# Allegro board DRV830x_D1-RELEASE.brd
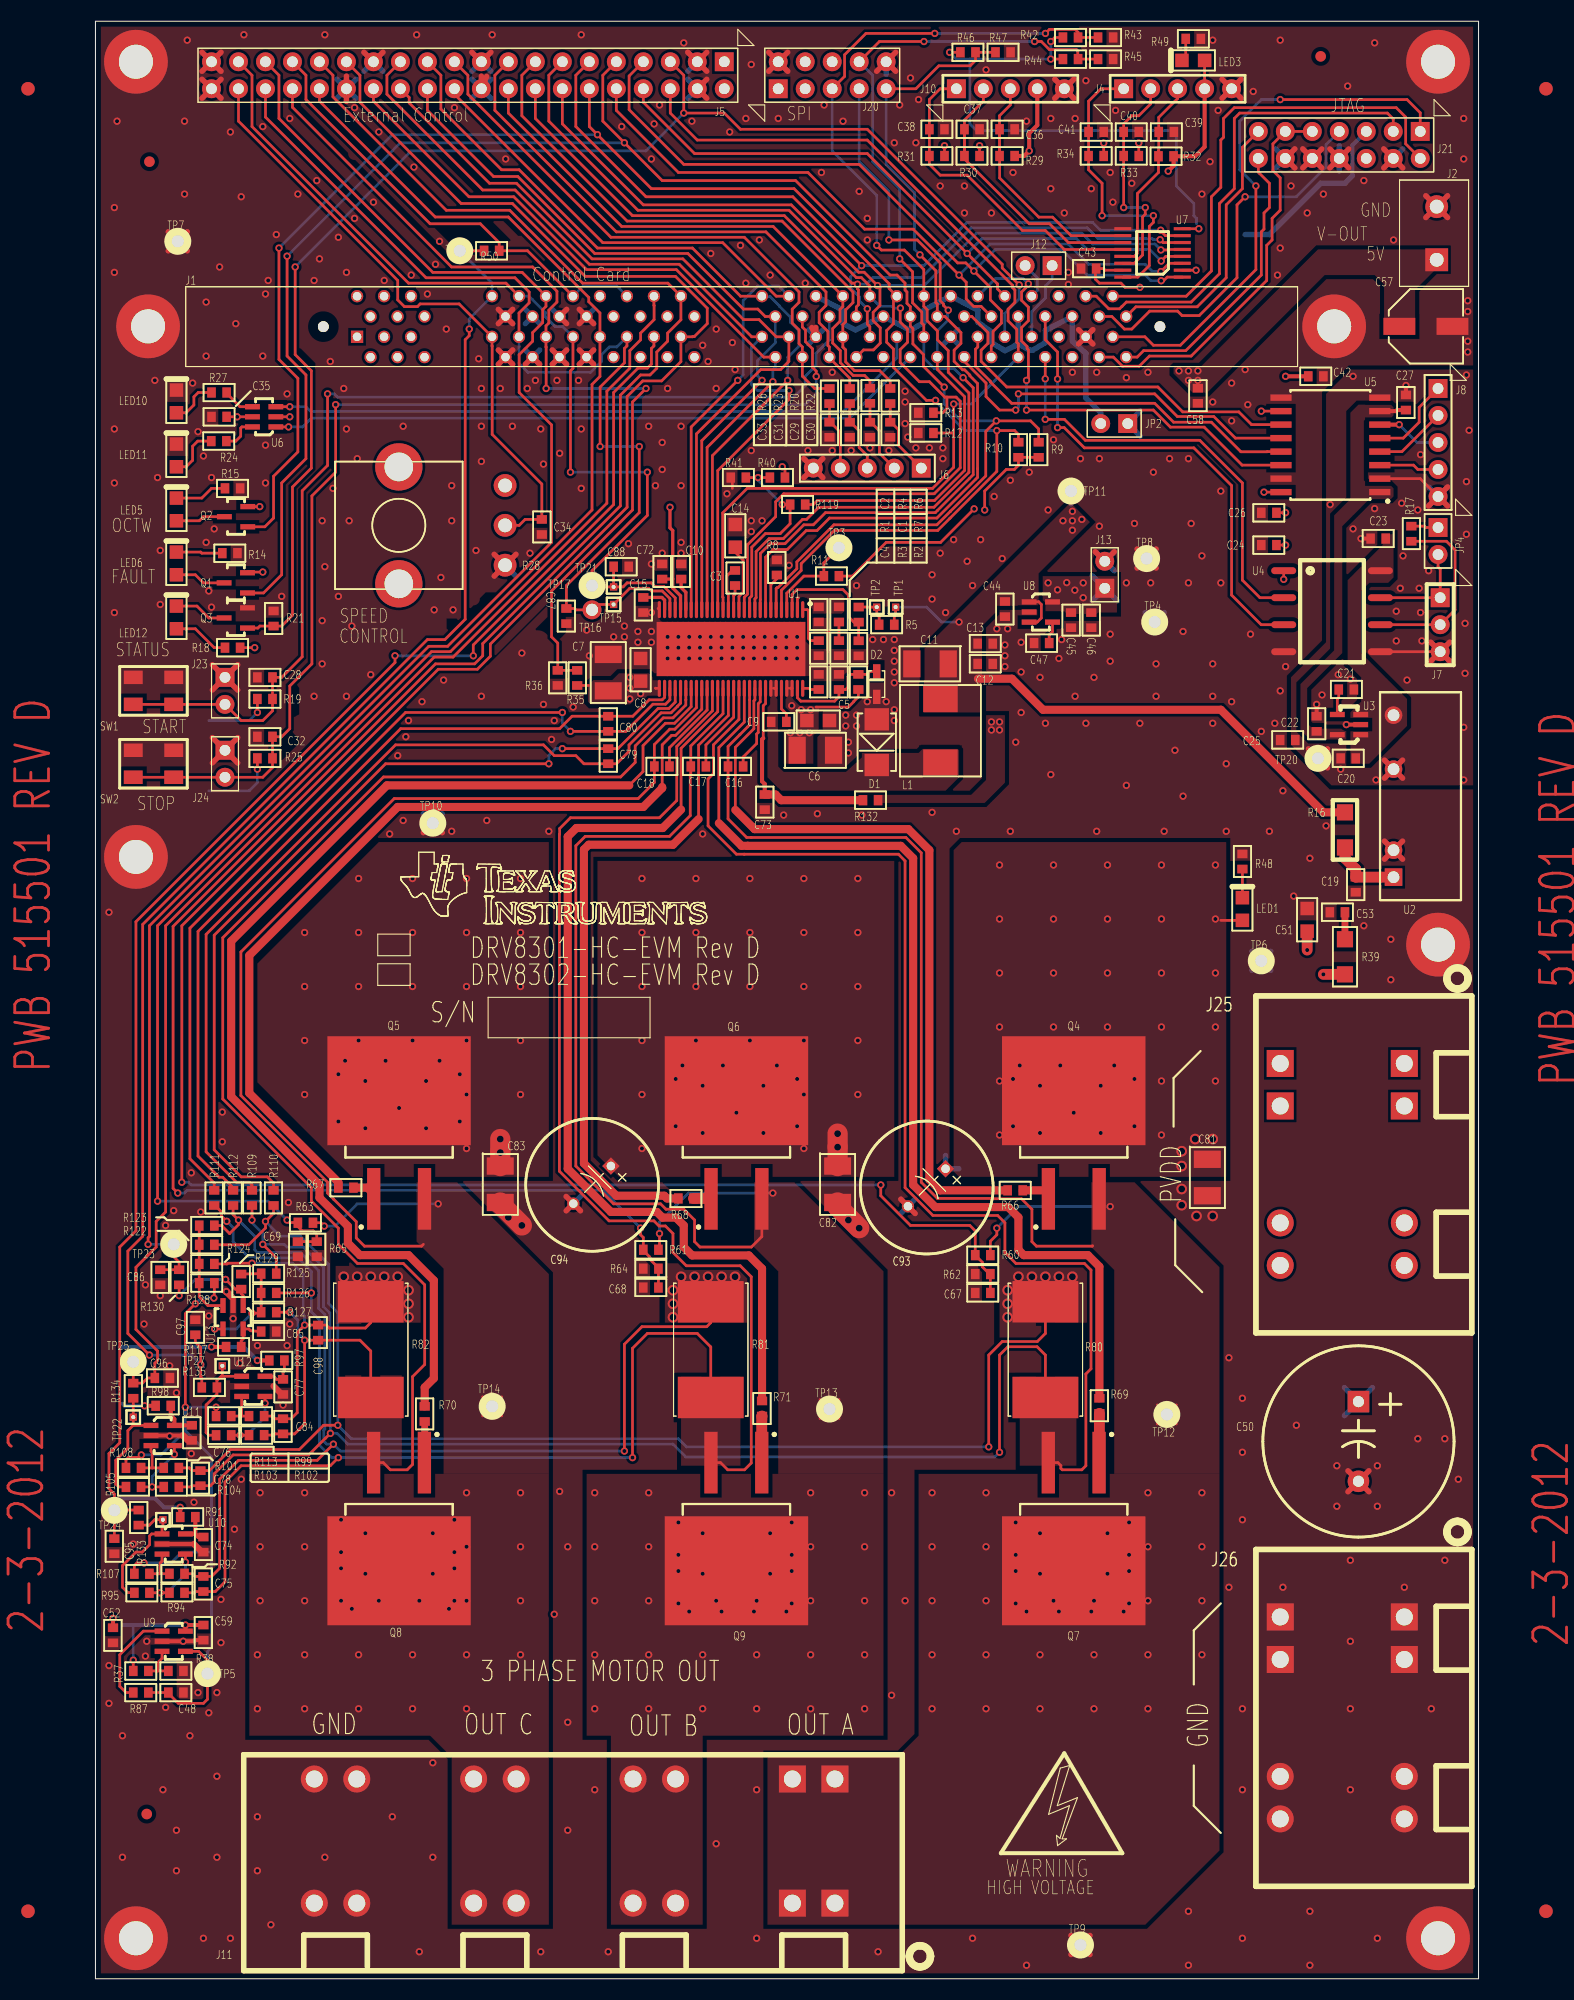
[diagram p0: board, top side]
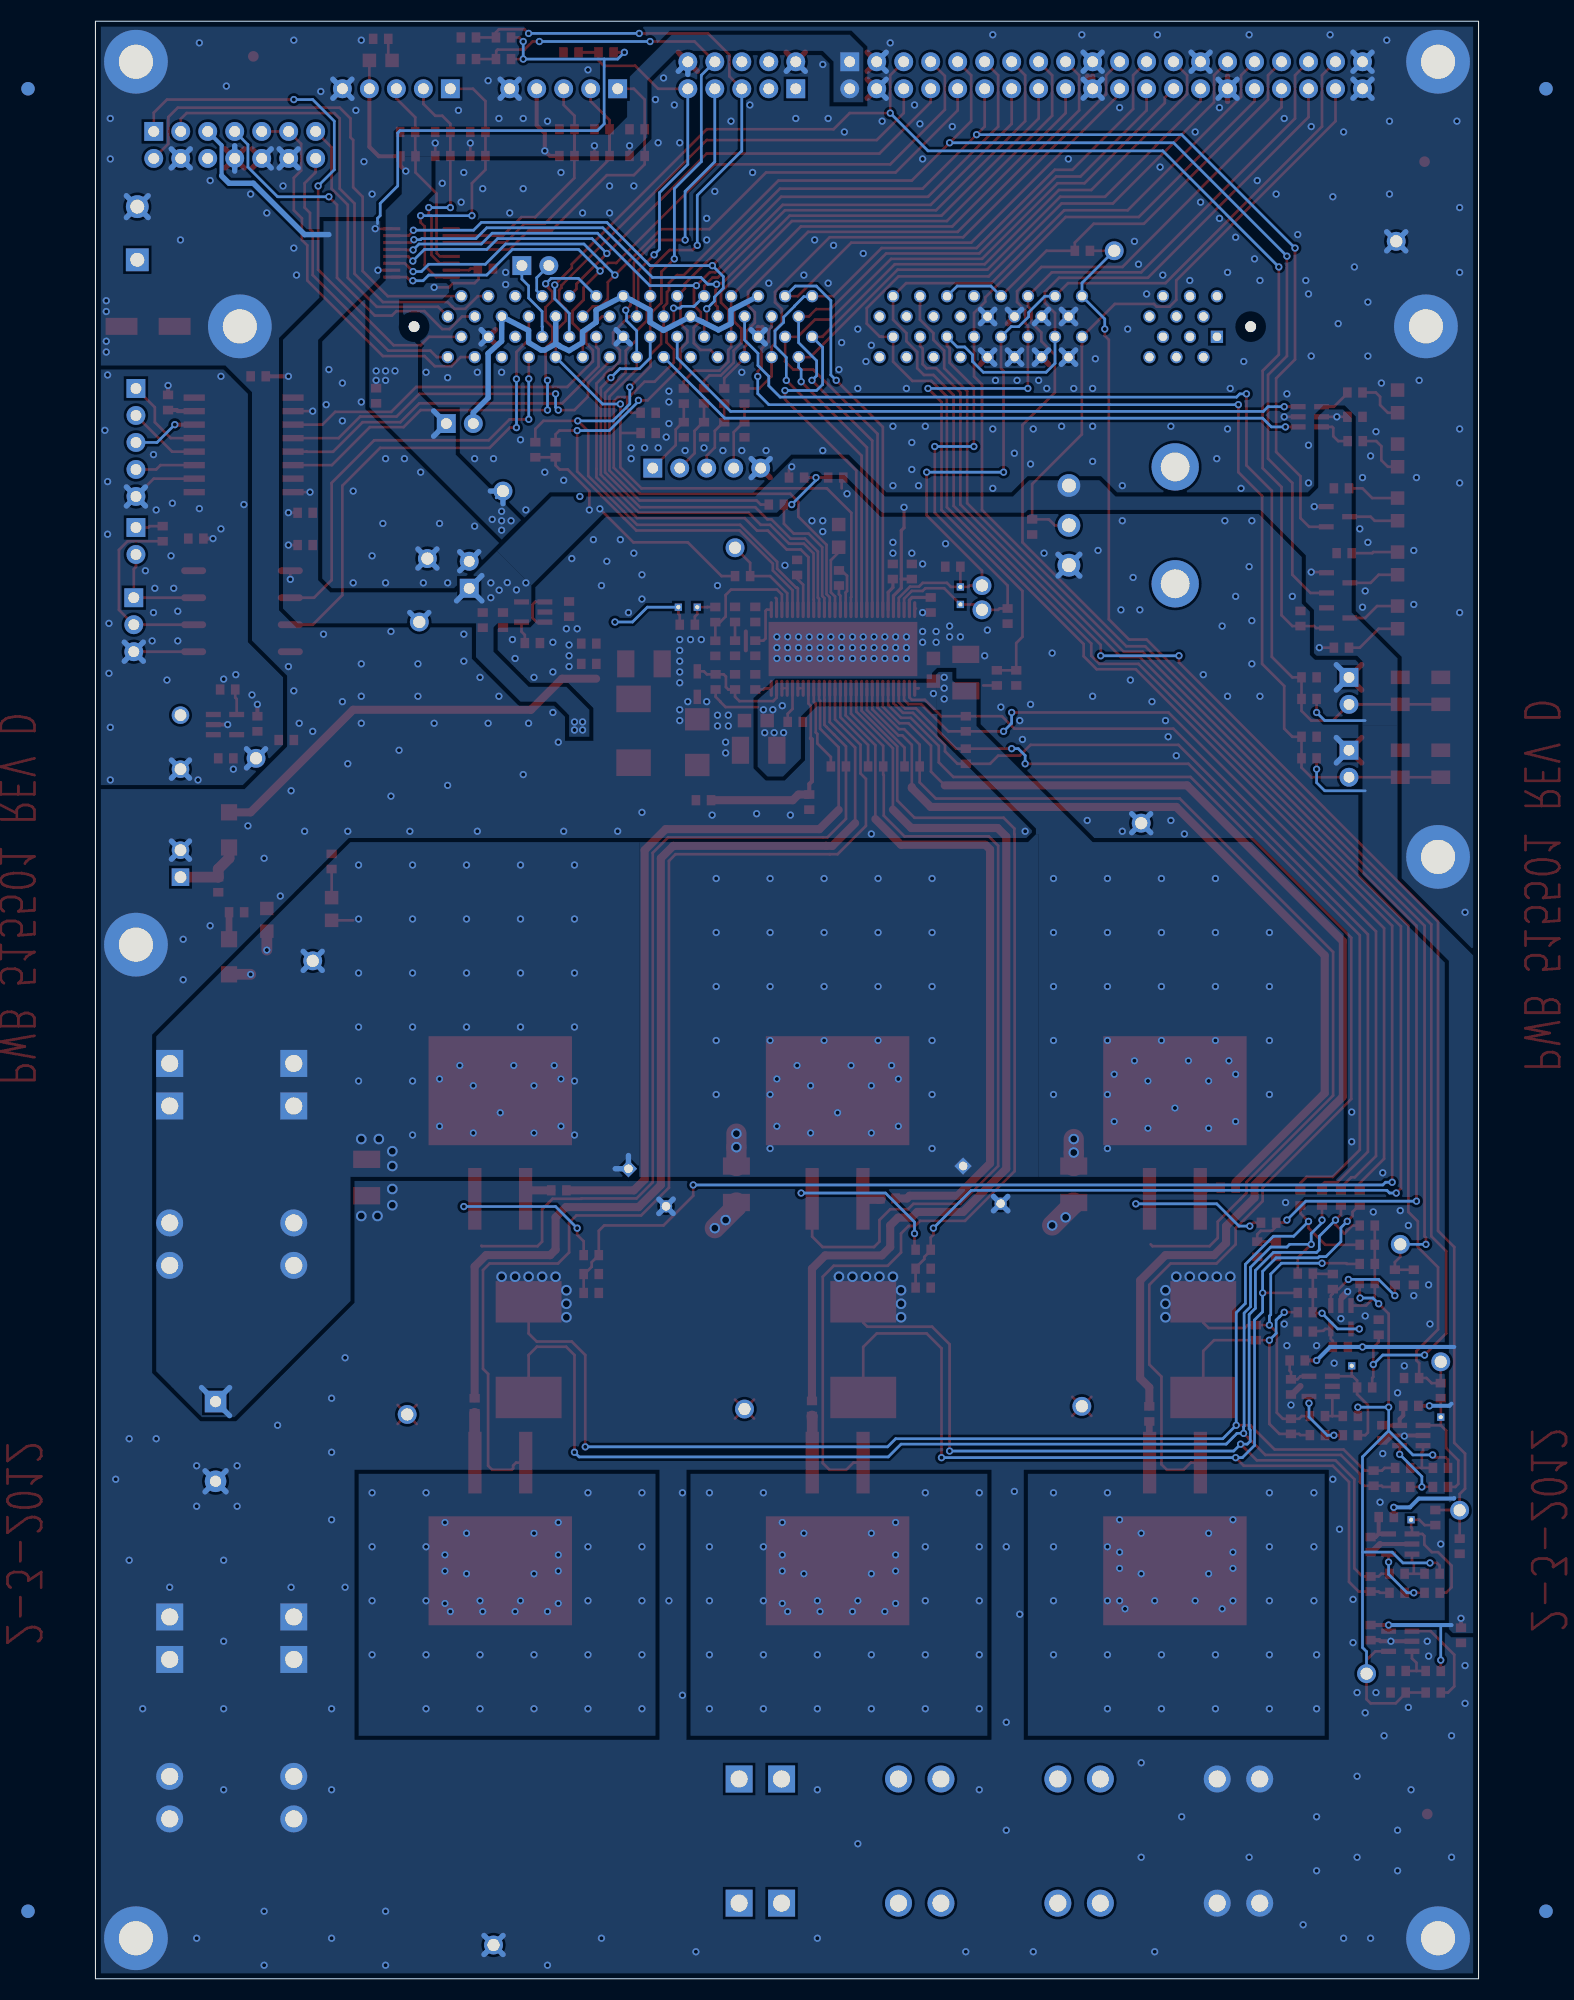
[diagram p1: board, bottom side, seen from below]

Outline 130.18 x 184.15 mm; copper layers: TOP, BOTTOM. Coordinates in mm from the lower left corner of the outline.
Outline path: rectangle 0,0 130.18,184.15

## Placement (name value [footprint] x y rotation side)
C1  6800pF  [D3-SM_C_0603_NP]  69.98 124.46 90 top
C2  39pF  [D3-SM_C_0603_NP]  68.07 127.64 90 top
C3  0.022uF  [D3-SM_C_0603_NP]  60.2 131.06 90 top
C4  0.015uF  [D3-SM_C_0603_NP]  68.07 121.28 90 top
C5  0.1uF  [D3-SM_C_0805_NP]  69.09 118.36 180 top
C6  2.2uF  [D3-SM_C_1210_NP]  66.04 115.57 0 top
C7  2.2uF  [D3-SM_C_1210_NP]  48.26 121.16 90 top
C8  0.1uF  [D3-SM_C_0805_NP]  51.31 124.21 270 top
C9  0.1uF  [D3-SM_C_0603_NP]  65.02 118.24 180 top
C10  1uF  [D3-SM_C_0603_NP]  55.13 133.1 270 top
C11  47uF  [D3-SM_C_1210_NP]  80.26 123.7 180 top
C12  1uF  [D3-SM_C_0603_NP]  84.45 123.7 180 top
C13  0.1uF  [D3-SM_C_0603_NP]  84.45 125.6 180 top
C14  2.2uF  [D3-SM_C_0805_NP]  60.22 134.67 90 top
C15  1uF  [D3-SM_C_0603_NP]  51.56 128.52 90 top
C16  0.1uF  [D3-SM_C_0603_NP]  60.96 114.05 180 top
C17  0.1uF  [D3-SM_C_0603_NP]  57.45 114.05 180 top
C18  0.1uF  [D3-SM_C_0603_NP]  54.03 114.05 180 top
C19  1uF  [D3-SM_C_0603_NP]  118.62 103.63 270 top
C20  2.2uF  [D3-SM_C_0603_NP]  118.62 114.81 180 top
C21  0.1uF  [D3-SM_C_0603_NP]  118.44 121.28 180 top
C22  2.2uF  [D3-SM_C_0603_NP]  114.94 117.35 90 top
C23  1uF  [D3-SM_C_0603_NP]  121.44 135.48 180 top
C24  0.1uF  [D3-SM_C_0603_NP]  109.73 134.87 0 top
C25  0.1uF  [D3-SM_C_0603_NP]  112.93 116.54 180 top
C26  0.1uF  [D3-SM_C_0603_NP]  109.73 137.91 0 top
C27  0.1uF  [D3-SM_C_0603_NP]  123.34 149 270 top
C28  0.1uF  [D3-SM_C_0603_NP]  15.24 122.43 0 top
C29  0.47 uF  [D3-SM_C_0603_NP]  72.9 146.43 270 top
C30  0.47 uF  [D3-SM_C_0603_NP]  74.8 146.43 270 top
C31  0.47 uF  [D3-SM_C_0603_NP]  70.99 146.43 270 top
C32  0.1uF  [D3-SM_C_0603_NP]  15.24 116.84 0 top
C33  0.47 uF  [D3-SM_C_0603_NP]  69.09 146.43 270 top
C34  0.1uF  [D3-SM_C_0603_NP]  42.01 135.86 90 top
C35  0.1uF  [D3-SM_C_0603_NP]  10.92 146.94 0 top
C36  0.001uF  [D3-SM_C_0603_NP]  85.09 173.99 0 top
C37  0.001uF  [D3-SM_C_0603_NP]  81.79 173.99 0 top
C38  0.001uF  [D3-SM_C_0603_NP]  78.49 173.99 0 top
C39  0.001uF  [D3-SM_C_0603_NP]  100.08 173.74 0 top
C40  0.001uF  [D3-SM_C_0603_NP]  96.77 173.74 0 top
C41  0.001uF  [D3-SM_C_0603_NP]  93.47 173.74 0 top
C42  0.1uF  [D3-SM_C_0603_NP]  115.57 150.75 180 top
C43  0.1uF  [D3-SM_C_0603_NP]  92.76 160.88 0 top
C44  2.2uF  [D3-SM_C_0603_NP]  85.6 129.57 270 top
C45  0.1uF  [D3-SM_C_0603_NP]  91.82 127.1 90 top
C46  2.2uF  [D3-SM_C_0603_NP]  93.73 128.52 270 top
C47  0.1uF  [D3-SM_C_0603_NP]  88.34 125.65 0 top
C48  2.2uF  [D3-SM_C_0603_NP]  6.86 26.92 0 top
C50  1000uF  [D3-PAN-TS-18X35MM]  118.87 50.55 0 top
C51  0.1uF  [D3-SM_C_0805_NP]  114.05 98.55 90 top
C52  NP  [D3-SM_C_0603_NP]  1.65 33.02 270 top
C53  0.01uF  [D3-SM_C_0603_NP]  117.6 100.33 180 top
C57  220uF  [D3-PAN-FK-CASE-D]  125.22 155.45 90 top
C58  0.1uF  [D3-SM_C_0603_NP]  103.76 148.21 90 top
C59  0.1uF  [D3-SM_C_0603_NP]  10.16 33.27 270 top
C67  0.1uF  [D3-SM_C_0603_NP]  84.23 64.52 180 top
C68  0.1uF  [D3-SM_C_0603_NP]  52.98 65.02 180 top
C69  0.1uF  [D3-SM_C_0603_NP]  19.05 69.34 270 top
C72  0.1uF  [D3-SM_C_0603_NP]  53.34 133.1 270 top
C73  0.1uF  [D3-SM_C_0603_NP]  62.99 109.98 90 top
C74  0.1uF  [D3-SM_C_0603_NP]  10.16 40.13 90 top
C75  1000pF  [D3-SM_C_0603_NP]  10.16 37.85 270 top
C76  0.1uF  [D3-SM_C_0603_NP]  9.07 50.65 90 top
C77  0.1uF  [D3-SM_C_0603_NP]  17.65 54.97 90 top
C78  1000pF  [D3-SM_C_0603_NP]  9.88 47.8 270 top
C79  0.001uF  [D3-SM_C_0603_NP]  48.26 114.3 90 top
C80  0.001uF  [D3-SM_C_0603_NP]  48.26 117.35 90 top
C81  2.2uF  [D3-SM_C_1210_NP]  104.65 77.09 270 top
C82  2.2uF  [D3-SM_C_1210_NP]  69.85 76.45 270 top
C83  2.2uF  [D3-SM_C_1210_NP]  38.1 76.45 270 top
C84  1000pF  [D3-SM_C_0603_NP]  17.65 52.68 270 top
C85  0.1uF  [D3-SM_C_0603_NP]  17.02 60.88 180 top
C86  NP  [D3-SM_C_0603_NP]  6.1 66.7 270 top
C87  NP  [D3-SM_C_0603_NP]  44.32 128.91 270 top
C88  NP  [D3-SM_C_0603_NP]  48.77 132.84 0 top
C93  330uF  [D3-PAN-VZ-12_5X25MM]  80.01 76.2 315 top
C94  330uF  [D3-PAN-VZ-12_5X25MM]  48.51 76.45 315 top
C95  NP  [D3-SM_C_0603_NP]  1.78 41.4 270 top
C96  NP  [D3-SM_C_0603_NP]  5.59 56.52 0 top
C97  NP  [D3-SM_C_0603_NP]  9.4 60.58 90 top
C98  0.001uF  [D3-SM_C_0603_NP]  20.95 60.07 90 top
D1  CDBB2100-G  [D3-SMB-12]  73.53 116.33 180 top
D2  NP  [D3-SOD323-21]  73.53 121.79 90 top
J1  DIMM100  [D3-CONTROLCARD100-SOCKET]  24.62 154.47 0 top
J2  TERM BLOCK 2x1  [D3-TB-5MM-2X1_1]  126.24 164.21 90 top
J4  HEADER5x1  [D3-ST_HEADER_5_100]  96.77 177.8 0 top
J5  HEADER20x2  [D3-ST_HEADER_20X2_100]  59.18 180.34 180 top
J6  HEADER5x1  [D3-ST_HEADER_5_100]  77.72 142.11 180 top
J7  HEADER3x1  [D3-ST_HEADER_3_100]  126.57 129.92 270 top
J8  HEADER5x1  [D3-ST_HEADER_5_100]  126.36 149.61 270 top
J10  HEADER5x1  [D3-ST_HEADER_5_100]  81.03 177.8 0 top
J11  TERM BLOCK HEADER 4x1  [D3-TB-5MM-4X1_4HOLES_CKT]  69.6 7.11 180 top
J12  HEADER2x1  [D3-ST_HEADER_2_100]  90.04 161.16 180 top
J13  HEADER2x1  [D3-ST_HEADER_2_100]  95 130.81 90 top
J20  HEADER5x2  [D3-ST_HEADER_5X2_100]  64.26 177.8 0 top
J21  HEADER7x2  [D3-ST_HEADER_7X2_100]  124.69 173.79 180 top
J23  HEADER2x1  [D3-ST_HEADER_2_100]  12.19 122.43 270 top
J24  HEADER2x1  [D3-ST_HEADER_2_100]  12.19 115.57 270 top
J25  TERM BLOCK HEADER 2x1  [D3-TB-15MM-2X1_4HOLES_CKT]  123.19 86.11 270 top
J26  TERM BLOCK HEADER 2x1  [D3-TB-15MM-2X1_4HOLES_CKT]  123.19 34.04 270 top
JP2  JUMPER  [D3-ST_HEADER_2_100]  97.16 146.3 180 top
JP4  JUMPER  [D3-ST_HEADER_2_100]  126.36 136.53 270 top
L1  33uH  [D3-COILTRONICS-DR73]  79.53 114.4 90 top
LED1  GREEN  [D3-SM_D_0805_ALT]  107.95 99.57 90 top
LED3  GREEN  [D3-SM_D_0805_ALT]  104.39 180.47 180 top
LED5  YELLOW  [D3-SM_D_0805_ALT]  7.62 137.16 90 top
LED6  RED  [D3-SM_D_0805_ALT]  7.62 132.08 90 top
LED10  GREEN  [D3-SM_D_0805_ALT]  7.62 147.32 90 top
LED11  GREEN  [D3-SM_D_0805_ALT]  7.62 142.24 90 top
LED12  GREEN  [D3-SM_D_0805_ALT]  7.62 127 90 top
MH1  MOUNT HOLE  [D3-MH_4-40]  3.81 180.34 0 top
MH2  MOUNT HOLE  [D3-MH_4-40]  126.36 180.34 0 top
MH3  MOUNT HOLE  [D3-MH_4-40]  4.95 155.45 0 top
MH4  MOUNT HOLE  [D3-MH_4-40]  116.59 155.45 0 top
MH5  MOUNT HOLE  [D3-MH_4-40]  3.81 3.81 0 top
MH6  MOUNT HOLE  [D3-MH_4-40]  126.36 3.81 0 top
MH7  MOUNT HOLE  [D3-MH_4-40]  3.81 105.54 0 top
MH8  MOUNT HOLE  [D3-MH_4-40]  126.36 97.28 0 top
NOREF  -  [unnamed]  -6.35 6.35 0 top
NOREF#2  -  [#2]  0 184.15 0 top
NOREF#3  -  [#2]  37.67 101.42 0 top
NOREF#4  -  [#2]  142.88 0 90 top
NOREF#5  -  [unnamed]  136.53 177.8 0 top
NOREF#6  -  [#2]  132.08 184.78 0 top
NOREF#7  -  [unnamed#3]  115.32 180.85 0 top
NOREF#8  -  [unnamed#3]  5.08 170.94 0 top
NOREF#9  -  [#2]  128.32 171.42 0 top
NOREF#10  -  [unnamed#3]  4.83 15.49 0 top
NOREF#11  -  [#2]  -36.2 -33.45 0 top
NOREF#12  -  [unnamed]  136.53 6.35 0 top
NOREF#13  -  [unnamed]  -6.35 177.8 0 top
NOREF#14  -  [#2]  -36.2 -33.45 0 top
NOREF#15  -  [#2]  -12.7 184.15 0 top
NOREF#16  -  [unnamed]  136.53 6.35 180 bottom
NOREF#17  -  [unnamed]  136.53 177.8 180 bottom
NOREF#18  -  [unnamed]  -6.35 6.35 180 bottom
NOREF#19  -  [unnamed]  -6.35 177.8 180 bottom
Q1  Si2325  [D3-TI-SOT23-DBV3]  13.21 131.32 180 top
Q2  Si2325  [D3-TI-SOT23-DBV3]  13.23 137.54 180 top
Q3  2N7002E  [D3-TI-SOT23-DBV3]  13.21 128.02 180 top
Q4  SUM110N06-3m9H  [D3-TO254_TO229_COMBINED]  92.08 78.74 90 top
Q5  SUM110N06-3m9H  [D3-TO254_TO229_COMBINED]  28.57 78.74 90 top
Q6  SUM110N06-3m9H  [D3-TO254_TO229_COMBINED]  60.33 78.74 90 top
Q7  SUM110N06-3m9H  [D3-TO254_TO229_COMBINED]  92.08 43.18 270 top
Q8  SUM110N06-3m9H  [D3-TO254_TO229_COMBINED]  28.57 43.18 270 top
Q9  SUM110N06-3m9H  [D3-TO254_TO229_COMBINED]  60.33 43.18 270 top
R1  205K_1%  [D3-SM_R_0603]  68.07 124.46 90 top
R2  NP  [D3-SM_R_0603]  71.81 121.28 90 top
R3  NP  [D3-SM_R_0603]  69.98 121.28 90 top
R4  28.0K_1%  [D3-SM_R_0603]  69.98 127.64 90 top
R5  0.0  [D3-SM_R_0603]  75.18 127.38 180 top
R6  53.6K_1%  [D3-SM_R_0603]  71.83 129.04 270 top
R7  10K_1%  [D3-SM_R_0603]  71.83 125.87 270 top
R8  1  [D3-SM_R_0603]  64.14 133.48 270 top
R9  10K_1%  [D3-SM_R_0603]  88.77 143.13 90 top
R10  10K_1%  [D3-SM_R_0603]  86.87 143.13 90 top
R11  10K_1%  [D3-SM_R_0603]  69.98 131.95 180 top
R12  1K  [D3-SM_R_0603]  78.87 145.41 180 top
R13  1K  [D3-SM_R_0603]  78.87 147.32 180 top
R14  330  [D3-SM_R_0603]  11.94 134.11 0 top
R15  330  [D3-SM_R_0603]  12.19 140.21 0 top
R16  1  [D3-SM_R_1206]  117.6 109.73 270 top
R17  120  [D3-SM_R_0603]  123.85 135.23 90 top
R18  330  [D3-SM_R_0603]  12.19 125.22 0 top
R19  4.99K_1%  [D3-SM_R_0603]  15.24 120.4 0 top
R20  470  [D3-SM_R_0603]  72.9 148.21 90 top
R21  1K  [D3-SM_R_0603]  16.76 127.25 90 top
R22  470  [D3-SM_R_0603]  74.8 149.61 270 top
R23  470  [D3-SM_R_0603]  70.99 149.61 270 top
R24  330  [D3-SM_R_0603]  12.32 144.65 180 top
R25  4.99K_1%  [D3-SM_R_0603]  15.24 114.81 0 top
R26  470  [D3-SM_R_0603]  69.09 149.61 270 top
R27  330  [D3-SM_R_0603]  10.92 149.22 0 top
R28  10K 1-turn  [D3-CTS-296]  33.55 136.73 180 top
R29  1K  [D3-SM_R_0603]  86.51 171.48 180 top
R30  1K  [D3-SM_R_0603]  83.21 171.48 180 top
R31  1K  [D3-SM_R_0603]  79.91 171.48 180 top
R32  1K  [D3-SM_R_0603]  101.47 171.45 180 top
R33  1K  [D3-SM_R_0603]  98.2 171.48 180 top
R34  1K  [D3-SM_R_0603]  94.89 171.48 180 top
R35  95.3K_1%  [D3-SM_R_0603]  45.34 121.67 90 top
R36  4.99K_1%  [D3-SM_R_0603]  43.51 123.09 270 top
R37  10K .1%  [D3-SM_R_0603]  3.56 28.96 0 top
R38  10K .1%  [D3-SM_R_0603]  6.86 28.96 0 top
R39  3.3  [D3-SM_R_1206]  117.6 94.49 90 top
R40  NP  [D3-SM_R_0603]  64.9 141.22 180 top
R41  NP  [D3-SM_R_0603]  61.21 141.22 180 top
R42  NP  [D3-SM_R_0603]  91.06 182.63 0 top
R43  NP  [D3-SM_R_0603]  94.36 182.63 0 top
R44  NP  [D3-SM_R_0603]  91.06 180.59 0 top
R45  NP  [D3-SM_R_0603]  94.36 180.59 0 top
R46  NP  [D3-SM_R_0603]  81.41 181.23 0 top
R47  NP  [D3-SM_R_0603]  84.71 181.23 0 top
R48  4.99K_1%  [D3-SM_R_0603]  107.95 104.39 90 top
R49  820  [D3-SM_R_0603]  102.62 182.5 0 top
R50  0  [D3-SM_R_0603]  36.58 162.56 0 top
R60  95.3K_1%  [D3-SM_R_0603]  82.8 68.07 0 top
R61  95.3K_1%  [D3-SM_R_0603]  51.56 68.58 0 top
R62  4.99K_1%  [D3-SM_R_0603]  84.23 66.29 180 top
R63  95.3K_1%  [D3-SM_R_0603]  19.05 71.12 0 top
R64  4.99K_1%  [D3-SM_R_0603]  52.98 66.8 180 top
R65  4.99K_1%  [D3-SM_R_0603]  20.83 69.34 270 top
R66  1  [D3-SM_R_0603]  85.85 74.17 0 top
R67  1  [D3-SM_R_0603]  22.86 74.42 0 top
R68  1  [D3-SM_R_0603]  54.86 73.41 0 top
R69  1  [D3-SM_R_0603]  94.49 54.61 270 top
R70  1  [D3-SM_R_0603]  30.99 53.85 270 top
R71  1  [D3-SM_R_0603]  62.74 54.36 270 top
R80  0.002_1%  [D3-SM_R_4527]  89.41 59.18 180 top
R81  0.002_1%  [D3-SM_R_4527]  57.91 59.18 180 top
R82  0.002_1%  [D3-SM_R_4527]  25.91 59.18 180 top
R87  10  [D3-SM_R_0603]  3.56 26.92 0 top
R91  0  [D3-SM_R_0603]  9.4 43.43 180 top
R92  1K .1%  [D3-SM_R_0603]  8.38 38.1 180 top
R94  1K .1%  [D3-SM_R_0603]  8.38 36.31 180 top
R95  10K .1%  [D3-SM_R_0603]  5.08 36.31 180 top
R97  0  [D3-SM_R_0603]  17.78 58.17 180 top
R98  0  [D3-SM_R_0603]  7.09 53.9 180 top
R99  1K .1%  [D3-SM_R_0603]  15.88 52.93 180 top
R101  1K .1%  [D3-SM_R_0603]  7.85 48.06 180 top
R102  1K .1%  [D3-SM_R_0603]  15.88 51.14 180 top
R103  10K .1%  [D3-SM_R_0603]  12.78 51.13 180 top
R104  1K .1%  [D3-SM_R_0603]  7.85 46.27 180 top
R105  10K .1%  [D3-SM_R_0603]  4.29 46.27 180 top
R107  10K .1%  [D3-SM_R_0603]  5.08 38.1 180 top
R108  10K .1%  [D3-SM_R_0603]  4.29 48.06 180 top
R109  0.0  [D3-SM_R_0603]  14.73 74.17 270 top
R110  0.0  [D3-SM_R_0603]  16.76 74.17 270 top
R111  0.0  [D3-SM_R_0603]  11.18 74.17 270 top
R112  0.0  [D3-SM_R_0603]  12.95 74.17 270 top
R113  10K .1%  [D3-SM_R_0603]  12.78 52.93 180 top
R117  0.0  [D3-SM_R_0603]  13.72 59.44 180 top
R119  0.0  [D3-SM_R_0603]  66.8 138.68 180 top
R122  4.99K_1%  [D3-SM_R_0603]  11.19 69.05 180 top
R123  4.99K_1%  [D3-SM_R_0603]  11.19 70.85 180 top
R124  4.99K_1%  [D3-SM_R_0603]  11.19 67.25 180 top
R125  4.99K_1%  [D3-SM_R_0603]  17.02 66.33 180 top
R126  4.99K_1%  [D3-SM_R_0603]  17.02 64.52 180 top
R127  4.99K_1%  [D3-SM_R_0603]  17.02 62.7 180 top
R128  49.9K_1%  [D3-SM_R_0603]  11.19 65.44 180 top
R129  49.9K_1%  [D3-SM_R_0603]  13.72 66.29 270 top
R130  0.0  [D3-SM_R_0603]  7.87 65.28 90 top
R132  0.0  [D3-SM_R_0603]  73.66 110.87 180 top
R133  0  [D3-SM_R_0603]  4.06 42.67 90 top
R134  0  [D3-SM_R_0603]  3.56 54.61 90 top
R135  0  [D3-SM_R_0603]  11.43 55.63 180 top
SW1  SW PUSH-SPST NO  [D3-BOURNS-4MM-SWITCH]  9.91 119.89 270 top
SW2  SW PUSH-SPST NO  [D3-BOURNS-4MM-SWITCH]  9.91 113.03 270 top
TP1  TEST-POINT  [D3_TP_13]  75.31 129.03 0 top
TP2  TEST-POINT  [D3_TP_13]  73.53 129.03 0 top
TP3  TP-LOOP-ORANGE  [D3-KEYSTONE-MINI-TP]  69.98 134.62 0 top
TP4  TP-LOOP-RED  [D3-KEYSTONE-MINI-TP]  99.69 127.64 0 top
TP5  TP-LOOP-RED  [D3-KEYSTONE-MINI-TP]  10.54 28.7 0 top
TP6  TP-LOOP-RED  [D3-KEYSTONE-MINI-TP]  109.73 95.76 0 top
TP7  TP-LOOP-BLACK  [D3-KEYSTONE-MINI-TP]  7.75 163.45 0 top
TP8  TP-LOOP-BLACK  [D3-KEYSTONE-MINI-TP]  98.93 133.6 0 top
TP9  TP-LOOP-BLACK  [D3-KEYSTONE-MINI-TP]  92.71 3.17 0 top
TP10  TP-LOOP-BLACK  [D3-KEYSTONE-MINI-TP]  31.75 108.71 0 top
TP11  TP-LOOP-RED  [D3-KEYSTONE-MINI-TP]  91.82 139.95 0 top
TP12  TP-LOOP-ORANGE  [D3-KEYSTONE-MINI-TP]  100.84 53.09 90 top
TP13  TP-LOOP-ORANGE  [D3-KEYSTONE-MINI-TP]  69.09 53.59 90 top
TP14  TP-LOOP-ORANGE  [D3-KEYSTONE-MINI-TP]  37.34 53.85 90 top
TP15  TEST-POINT  [D3_TP_13]  48.77 129.29 0 top
TP16  TP-LOOP-ORANGE  [D3-KEYSTONE-MINI-TP]  46.74 128.78 0 top
TP17  TP-LOOP-ORANGE  [D3-KEYSTONE-MINI-TP]  46.74 131.06 0 top
TP18  TEST-POINT  [D3_TP_13]  6.35 43.18 0 top
TP19  TP-LOOP-ORANGE  [D3-KEYSTONE-MINI-TP]  34.29 162.56 0 top
TP20  TP-LOOP-BLACK  [D3-KEYSTONE-MINI-TP]  115.06 114.81 0 top
TP21  TEST-POINT  [D3_TP_13]  48.77 130.94 0 top
TP22  TEST-POINT  [D3_TP_13]  3.56 52.83 0 top
TP23  TP-LOOP-ORANGE  [D3-KEYSTONE-MINI-TP]  7.37 69.09 0 top
TP24  TP-LOOP-ORANGE  [D3-KEYSTONE-MINI-TP]  1.78 44.07 0 top
TP25  TP-LOOP-ORANGE  [D3-KEYSTONE-MINI-TP]  3.56 58.04 0 top
TP27  TEST-POINT-1  [D3_TP_13]  11.94 57.66 0 top
U1  DRV8301  [SOP50P810X120-57N]  59.82 125.09 270 top
U2  DCH010505S  [CONV_DCH0105XXSN7]  122.17 103.63 90 top
U3  TPS73633  [D3-TI-SOT23-DBV]  117.98 117.98 180 top
U4  ISO1050DUB  [D3-TI-DUB-8]  111.84 132.46 0 top
U5  ISO7241A  [SOIC127P1030X265-16N]  116.23 144.3 180 top
U6  SN74LVC2G17DBVR  [D3-TI-SOT23-DBV6]  15.88 146.94 180 top
U7  TXB0106PW  [D3-TI-PW-TSSOP16]  99.49 162.36 180 top
U8  TPS73633  [D3-TI-SOT23-DBV]  88.98 128.57 0 top
U9  OPA365  [D3-TI-SOT23-DBV]  7.37 31.75 0 top
U10  TLV2718DBVR  [D3-TI-SOT23-DBV]  7.37 40.89 0 top
U11  TLV2718DBVR  [D3-TI-SOT23-DBV]  6.32 51.1 0 top
U12  TLV2718DBVR  [D3-TI-SOT23-DBV]  14.86 55.73 0 top
U13  OPA365  [D3-TI-SOT23-DBV]  12.95 62.23 270 top

## Library data of the parts
C1-C48 C51-C53 C58 C59 C67-C69 C72-C88 C95-C98 = C_NP
C50 C57 C93 C94 = C_ELEC
D1 = SCHOTTKY
D2 = ZENER
J1 = DIMM100_controlCARD_28035_28069
J2 = D3_CONN_2
J4 J6 J8 J10 = D3_CONN_5
J5 = HEADER 20X2
J7 = HEADER 3X1
J11 = D3_TERM-BLOCK-4X1X4
J12 J13 J23 J24 = HEADER 2X1
J20 = HEADER 5X2
J21 = HEADER 7X2
J25 J26 = D3_TERM-BLOCK-2X1X4
JP2 JP4 = JUMPER 1X2
L1 = INDUCTOR
LED1 LED3 LED5 LED6 LED10-LED12 = LED
MH1-MH8 = MOUNT_HOLE_1
Q1 Q2 = MOSFET_P_1
Q3 = MOSFET_N_1
Q4-Q9 = MOSFET_N_2
R1-R27 R29-R50 R60-R71 R87 R91 R92 R94 R95 R97-R99 R101-R105 R107-R113 R117 R119 R122-R130 R132-R135 = RESISTOR
R28 = POT_1
R80-R82 = RESISTOR_4-TERM
SW1 SW2 = SW PUSHBUTTON-SPST-NO
TP1-TP25 TP27 = TEST-POINT-1
U1 = DRV8301DCA
U2 = DCH0105XXS
U3 U8 = TPS7363XXDBVREP
U4 = ISO1050
U5 = ISO7241ADW
U6 = BUFFER_DUAL_1
U7 = TXB0106PW
U9-U13 = OP_AMP_SINGLE_5_PIN_1

## Footprints (pads in the part's own frame, mm; a bottom-side part is the same pattern mirrored in y, then rotated)
CONV_DCH0105XXSN7
  rect 1.651x1.651 hole 1.1: 1(0,0)
  round 1.651 hole 1.1: 2(2.54,0) 5(10.16,0) 7(15.24,0)
D3-BOURNS-4MM-SWITCH
  rect 1.27x1.778 smd: 1(-2.54,-6.35) 2(-2.54,-2.54) 3(0,-2.54) 4(0,-6.35)
D3-COILTRONICS-DR73
  rect 2.499x3.251 smd: 1(0,0) 2(5.999,0)
D3-CONTROLCARD100-SOCKET
  round 1.016 hole 2.36 unplated: (-3.175,0.955) (75.565,0.955)
  rect 1.151x1.151 hole 0.8: 1(0,0)
  round 1.151 hole 0.8: 2(1.27,-1.91) 3(2.54,0) 4(3.81,-1.91) 5(5.08,0) 6(6.35,-1.91) 7(12.7,0) 8(13.97,-1.91) 9(15.24,0) 10(16.51,-1.91) 11(17.78,0) 12(19.05,-1.91) 13(20.32,0) 14(21.59,-1.91) 15(22.86,0) 16(24.13,-1.91) 17(25.4,0) 18(26.67,-1.91) 19(27.94,0) 20(29.21,-1.91) 21(30.48,0) 22(31.75,-1.91) 23(38.1,0) 24(39.37,-1.91) 25(40.64,0) 26(41.91,-1.91) 27(43.18,0) 28(44.45,-1.91) 29(45.72,0) 30(46.99,-1.91) 31(48.26,0) 32(49.53,-1.91) 33(50.8,0) 34(52.07,-1.91) 35(53.34,0) 36(54.61,-1.91) 37(55.88,0) 38(57.15,-1.91) 39(58.42,0) 40(59.69,-1.91) 41(60.96,0) 42(62.23,-1.91) 43(63.5,0) 44(64.77,-1.91) 45(66.04,0) 46(67.31,-1.91) 47(68.58,0) 48(69.85,-1.91) 49(71.12,0) 50(72.39,-1.91) 51(0,3.82) 52(1.27,1.91) 53(2.54,3.82) 54(3.81,1.91) 55(5.08,3.82) 56(6.35,1.91) 57(12.7,3.82) 58(13.97,1.91) 59(15.24,3.82) 60(16.51,1.91) 61(17.78,3.82) 62(19.05,1.91) 63(20.32,3.82) 64(21.59,1.91) 65(22.86,3.82) 66(24.13,1.91) 67(25.4,3.82) 68(26.67,1.91) 69(27.94,3.82) 70(29.21,1.91) 71(30.48,3.82) 72(31.75,1.91) 73(38.1,3.82) 74(39.37,1.91) 75(40.64,3.82) 76(41.91,1.91) 77(43.18,3.82) 78(44.45,1.91) 79(45.72,3.82) 80(46.99,1.91) 81(48.26,3.82) 82(49.53,1.91) 83(50.8,3.82) 84(52.07,1.91) 85(53.34,3.82) 86(54.61,1.91) 87(55.88,3.82) 88(57.15,1.91) 89(58.42,3.82) 90(59.69,1.91) 91(60.96,3.82) 92(62.23,1.91) 93(63.5,3.82) 94(64.77,1.91) 95(66.04,3.82) 96(67.31,1.91) 97(68.58,3.82) 98(69.85,1.91) 99(71.12,3.82) 100(72.39,1.91)
D3-CTS-296
  round 4.45 hole 2.7: (5.001,5.499) (5.001,-5.499)
  round 2.149 hole 1.3: 1(-5.001,3.749) 2(-5.001,0) 3(-5.001,-3.749)
D3-KEYSTONE-MINI-TP
  round 1.778 hole 1.143: 1(0,0)
D3-MH_4-40
  round 5.999 hole 3.2: 1(0,0)
D3-PAN-FK-CASE-D
  rect 1.6x3 smd: 1(0,2.499) 2(0,-2.499)
D3-PAN-TS-18X35MM
  rect 2.032x2.032 hole 1.049: 1(0,3.749)
  round 2.032 hole 1.049: 2(0,-3.749)
D3-PAN-VZ-12_5X25MM
  rect 1.151x1.151 hole 0.8: 1(0,0)
  round 1.151 hole 0.8: 2(0,-5.001)
D3-SM_C_0603_NP
  rect 0.813x0.965 smd: 1(0,0) 2(1.422,0)
D3-SM_C_0805_NP
  rect 1.27x1.27 smd: 1(0,0) 2(2.134,0)
D3-SM_C_1210_NP
  rect 1.626x2.54 smd: 1(0,0) 2(3.429,0)
D3-SM_D_0805_ALT
  rect 1.27x1.27 smd: 1(0,0) 2(2.134,0)
D3-SM_R_0603
  rect 0.813x0.965 smd: 1(0,0) 2(1.422,0)
D3-SM_R_1206
  rect 1.524x1.524 smd: 1(0,0) 2(3.302,0)
D3-SM_R_4527
  rect 6.2x3.899 smd: 1(0,4.501) 2(0,-4.501)
  rect 1.016x0.762 smd: 3(0,3) 4(0,-3)
D3-SMB-12
  rect 2.301x2.101 smd: 1(0,-2.149) 2(0,2.149)
D3-SOD323-21
  rect 1.349x0.701 smd: 1(1.199,0) 2(-1.199,0)
D3-ST_HEADER_2_100
  rect 1.778x1.778 hole 1.016: 1(0,0)
  round 1.778 hole 1.016: 2(2.54,0)
D3-ST_HEADER_3_100
  rect 1.778x1.778 hole 1.016: 1(0,0)
  round 1.778 hole 1.016: 2(2.54,0) 3(5.08,0)
D3-ST_HEADER_5_100
  rect 1.778x1.778 hole 1.016: 1(0,0)
  round 1.778 hole 1.016: 2(2.54,0) 3(5.08,0) 4(7.62,0) 5(10.16,0)
D3-ST_HEADER_5X2_100
  rect 1.778x1.778 hole 1.016: 1(0,0)
  round 1.778 hole 1.016: 2(0,2.54) 3(2.54,0) 4(2.54,2.54) 5(5.08,0) 6(5.08,2.54) 7(7.62,0) 8(7.62,2.54) 9(10.16,0) 10(10.16,2.54)
D3-ST_HEADER_7X2_100
  rect 1.778x1.778 hole 1.016: 1(0,0)
  round 1.778 hole 1.016: 2(0,2.54) 3(2.54,0) 4(2.54,2.54) 5(5.08,0) 6(5.08,2.54) 7(7.62,0) 8(7.62,2.54) 9(10.16,0) 10(10.16,2.54) 11(12.7,0) 12(12.7,2.54) 13(15.24,0) 14(15.24,2.54)
D3-ST_HEADER_20X2_100
  rect 1.778x1.778 hole 1.016: 1(0,0)
  round 1.778 hole 1.016: 2(0,2.54) 3(2.54,0) 4(2.54,2.54) 5(5.08,0) 6(5.08,2.54) 7(7.62,0) 8(7.62,2.54) 9(10.16,0) 10(10.16,2.54) 11(12.7,0) 12(12.7,2.54) 13(15.24,0) 14(15.24,2.54) 15(17.78,0) 16(17.78,2.54) 17(20.32,0) 18(20.32,2.54) 19(22.86,0) 20(22.86,2.54) 21(25.4,0) 22(25.4,2.54) 23(27.94,0) 24(27.94,2.54) 25(30.48,0) 26(30.48,2.54) 27(33.02,0) 28(33.02,2.54) 29(35.56,0) 30(35.56,2.54) 31(38.1,0) 32(38.1,2.54) 33(40.64,0) 34(40.64,2.54) 35(43.18,0) 36(43.18,2.54) 37(45.72,0) 38(45.72,2.54) 39(48.26,0) 40(48.26,2.54)
D3-TB-5MM-2X1_1
  rect 2.149x2.149 hole 1.3: 1(-2.499,0)
  round 2.149 hole 1.3: 2(2.499,0)
D3-TB-5MM-4X1_4HOLES_CKT
  rect 2.54x2.54 hole 1.6: 1A(0,0) 1B(4,0) 1C(4,-11.679) 1D(0,-11.679)
  round 2.54 hole 1.6: 2A(15.001,0) 2B(18.999,0) 2C(18.999,-11.679) 2D(15.001,-11.679) 3A(30,0) 3B(34,0) 3C(34,-11.679) 3D(30,-11.679) 4A(45.001,0) 4B(48.999,0) 4C(48.999,-11.679) 4D(45.001,-11.679)
D3-TB-15MM-2X1_4HOLES_CKT
  rect 2.54x2.54 hole 1.6: 1A(0,0) 1B(4,0) 1C(4,-11.679) 1D(0,-11.679)
  round 2.54 hole 1.6: 2A(15.001,0) 2B(18.999,0) 2C(18.999,-11.679) 2D(15.001,-11.679)
D3-TI-DUB-8
  oval 2.349x0.65 smd: 1(0,0) 2(0,-2.54) 3(0,-5.08) 4(0,-7.62) 5(9.101,-7.62) 6(9.101,-5.08) 7(9.101,-2.54) 8(9.101,0)
D3-TI-PW-TSSOP16
  rect 1.6x0.3 smd: 1(-2.799,2.276) 2(-2.799,1.626) 3(-2.799,0.975) 4(-2.799,0.325) 5(-2.799,-0.325) 6(-2.799,-0.975) 7(-2.799,-1.626) 8(-2.799,-2.276) 9(2.799,-2.276) 10(2.799,-1.626) 11(2.799,-0.975) 12(2.799,-0.325) 13(2.799,0.325) 14(2.799,0.975) 15(2.799,1.626) 16(2.799,2.276)
D3-TI-SOT23-DBV
  rect 1.4x0.5 smd: 1(-1.1,0.95) 2(-1.1,0) 3(-1.1,-0.95) 4(1.1,-0.95) 5(1.1,0.95)
D3-TI-SOT23-DBV3
  rect 1.4x0.5 smd: 1(-1.1,0.95) 2(-1.1,-0.95) 3(1.1,0)
D3-TI-SOT23-DBV6
  rect 1.4x0.5 smd: 1(-1.1,0.95) 2(-1.1,0) 3(-1.1,-0.95) 4(1.1,-0.95) 5(1.1,0) 6(1.1,0.95)
D3-TO254_TO229_COMBINED
  rect 5.799x1.25 smd: 1(-5.375,2.385) 3(-5.375,-2.395)
  rect 10.249x13.5 smd: 2(4.801,0)
D3_TP_13
  rect 0.686x0.686 hole 0.381: 1(0,0)
SOIC127P1030X265-16N
  rect 1.999x0.599 smd: 1(-4.651,4.445) 2(-4.651,3.175) 3(-4.651,1.905) 4(-4.651,0.635) 5(-4.651,-0.635) 6(-4.651,-1.905) 7(-4.651,-3.175) 8(-4.651,-4.445) 9(4.651,-4.445) 10(4.651,-3.175) 11(4.651,-1.905) 12(4.651,-0.635) 13(4.651,0.635) 14(4.651,1.905) 15(4.651,3.175) 16(4.651,4.445)
SOP50P810X120-57N
  oval 1.6x0.3 smd: 1(-3.701,6.749) 2(-3.701,6.251) 3(-3.701,5.751) 4(-3.701,5.25) 5(-3.701,4.75) 6(-3.701,4.249) 7(-3.701,3.749) 8(-3.701,3.251) 9(-3.701,2.751) 10(-3.701,2.25) 11(-3.701,1.75) 12(-3.701,1.25) 13(-3.701,0.749) 14(-3.701,0.249) 15(-3.701,-0.249) 16(-3.701,-0.749) 17(-3.701,-1.25) 18(-3.701,-1.75) 19(-3.701,-2.25) 20(-3.701,-2.751) 21(-3.701,-3.251) 22(-3.701,-3.749) 23(-3.701,-4.249) 24(-3.701,-4.75) 25(-3.701,-5.25) 26(-3.701,-5.751) 27(-3.701,-6.251) 28(-3.701,-6.749) 29(3.701,-6.749) 30(3.701,-6.251) 31(3.701,-5.751) 32(3.701,-5.25) 33(3.701,-4.75) 34(3.701,-4.249) 35(3.701,-3.749) 36(3.701,-3.251) 37(3.701,-2.751) 38(3.701,-2.25) 39(3.701,-1.75) 40(3.701,-1.25) 41(3.701,-0.749) 42(3.701,-0.249) 43(3.701,0.249) 44(3.701,0.749) 45(3.701,1.25) 46(3.701,1.75) 47(3.701,2.25) 48(3.701,2.751) 49(3.701,3.251) 50(3.701,3.749) 51(3.701,4.249) 52(3.701,4.75) 53(3.701,5.25) 54(3.701,5.751) 55(3.701,6.251) 56(3.701,6.749)
  rect 5.1x14 smd: 57(0,0)
unnamed
  round 1.27 smd: 1(0,0)
unnamed#3
  round 1.001 smd: (0,0)

## Nets
+5VI: C20.1 C23.1 U2.7(+VO) U3.1(IN) U3.3(EN) U4.8(VCC2)
GND: C1.1 C2.1 C4.2 C5.1 C6.2 C7.2 C8.1 C10.1 C11.2 C12.1 C13.1 C14.2 C15.1 C19.2 C24.1 C25.2 C26.1 C28.1 C29.2 C30.2 C31.2 C32.1 C33.2 C34.1 C35.1 C36.2 C37.2 C38.2 C39.2 C40.2 C41.2 C42.1 C43.1 C44.2 C45.1 C46.2 C47.1 C48.2 C50.2 C51.2 C52.2 C53.2 C57.2 C58.1 C59.2 C67.2 C68.2 C69.2 C72.1 C73.1 C74.1 C76.1 C77.1 C81.2 C82.2 C83.2 C85.1 C86.2 C87.2 C88.2 C93.2 C94.2 C95.2 C96.2 C97.2 D1.1(ANODE) D2.2(ANODE) J1.8(AGND) J1.10(AGND1) J1.12(AGND2) J1.14(AGND3) J1.27(DGND) J1.37(DGND1) J1.47(DGND2) J1.58(AGND4) J1.60(AGND5) J1.62(AGND6) J1.64(AGND7) J2.2 J4.5 J5.3 J5.4 J5.19 J5.20 J5.27 J5.30 J5.39 J5.40 J6.5 J10.5 J11.4A(4#4A) J11.4B(4#4B) J11.4C(4#4C) J11.4D(4#4D) J13.2 J20.2 J20.10 J21.4 J21.8 J21.10 J21.12 J23.1 J24.1 J26.1A(1#1A) J26.1B(1#1B) J26.1C(1#1C) J26.1D(1#1D) J26.2A(2#2A) J26.2B(2#2B) J26.2C(2#2C) J26.2D(2#2D) LED10.2(CATHODE) LED11.2(CATHODE) MH1.1 MH2.1 MH3.1 MH4.1 MH5.1 MH6.1 MH7.1 MH8.1 Q3.2(S) R1.1 R3.2 R7.2 R8.1 R12.2 R13.2 R14.2 R15.2 R21.2 R28.1(A) R36.2 R38.2 R41.2 R43.2 R45.2 R47.2 R48.2 R49.2 R62.2 R64.2 R65.2 R80.2 R81.2 R82.2 SW1.1 SW1.2 SW2.1 SW2.2 TP7.1 TP8.1 TP9.1 TP10.1 U1.28(AGND) U1.57(PPAD) U2.2(-VI) U4.4(GND1) U5.9(GND1.9) U5.15(GND2.15) U6.2(GND) U7.9(GND) U8.2(GND) U9.2(-VCC) U10.2(-VCC) U11.2(-VCC) U12.2(-VCC) U13.2(-VCC)
PVDD: C5.2 C6.1 C7.1 C8.2 C50.1 C51.1 C81.1 C82.1 C83.1 C93.1 C94.1 J25.1A(1#1A) J25.1B(1#1B) J25.1C(1#1C) J25.1D(1#1D) J25.2A(2#2A) J25.2B(2#2B) J25.2C(2#2C) J25.2D(2#2D) LED1.1(ANODE) Q4.2(D) Q5.2(D) Q6.2(D) R2.1 R35.1 R39.1 TP6.1 U1.29(PVDD1) U1.53(PVDD2) U1.54(PVDD3)
VCC_3.3V: C24.2 C26.2 C35.2 C42.2 C45.2 C46.1 C52.1 C59.1 C72.2 J13.1 J21.5 Q1.2(S) Q2.2(S) R9.1 R10.1 R11.1 R18.2 R19.1 R25.1 R28.3(B) R37.1 R40.1 R42.1 R44.1 R46.1 R91.2 R97.2 R98.2 R117.2 R132.1 TP4.1 U1.24(REF) U4.1(VCC1) U5.10(EN2) U5.16(VCC2) U6.5(VCC) U7.2(VCCA) U7.8(OE) U8.5(OUT) U9.5(+VCC)
VCC_5V: C11.1 C12.2 C13.2 C43.2 C44.1 C57.1 C58.2 J2.1 J4.4 J5.1 J5.2 J10.4 JP2.1 L1.2 LED3.1(ANODE) R5.1 R16.1 R29.1 R30.1 R31.1 R32.1 R33.1 R34.1 TP1.1 TP11.1 U7.15(VCCB) U8.1(IN) U8.3(EN)
VCC_5V_CC: J1.77(+5V IN) J1.82(+5V IN1) J1.87(+5V IN2) J1.92(+5V IN3) J1.96(+5V IN4) JP2.2
VCCI_3.3V: C22.1 C27.2 U3.5(OUT) U5.1(VCC1) U5.7(EN1)
/SCS: J1.86(GPIO-27) J20.9 R46.2 R47.1 U1.8(S\C\S\/M_PWM)
ADC-VHB1: C67.1 J1.21(ADC-B7) J5.29 R60.1 R62.1
ADC-VHB2: C68.1 J1.71(ADC-A7) J5.31 R61.1 R64.1
ADC-VHB3: C69.1 J1.15(ADC-B4) J5.32 R63.1 R65.1
CAN-H: J7.1 JP4.2 U4.7(CANH)
CAN-L: J7.2 R17.1 U4.6(CANL)
CAN-RX: J1.44(GPIO-30) U4.2(RXD)
CAN-TX: J1.94(GPIO-31) U4.3(TXD)
CAP1: J1.30(GPIO-40) J5.14 U7.5(A4)
CAP2: J1.80(GPIO-41) J5.16 U7.6(A5)
CAP3: J1.31(GPIO-42) J5.11 U7.7(A6)
DAC1: C30.1 J6.1 R22.2
DAC2: C29.1 J6.2 R20.1
DAC3: C31.1 J6.3 R23.2
DAC4: C33.1 J6.4 R26.2
DAC_PWM1: J1.29(GPIO-10) J5.15 R22.1
DAC_PWM2: J1.79(GPIO-11) J5.18 R20.2
DAC_PWM3: J1.28(GPIO-08) J5.17 R23.1
DAC_PWM4: J1.26(GPIO-06) J5.21 R26.1
DC_CAL: J1.81(GPIO-43) J5.13 R13.1 U1.12(DC_CAL)
E1A: C41.1 J4.1 R34.2 U7.16(B1)
E1B: C40.1 J4.2 R33.2 U7.14(B2)
E1C: C39.1 J4.3 R32.2 U7.13(B3)
E2A: C38.1 J10.1 R31.2 U7.12(B4)
E2B: C37.1 J10.2 R30.2 U7.11(B5)
E2C: C36.1 J10.3 R29.2 U7.10(B6)
EMU0: J1.100(EMU0) J21.13
EMU1: J1.50(EMU1) J21.14
EN_GATE: J1.42(GPIO-39/51) J5.6 R12.1 U1.16(EN_GATE)
EXT_IA-FB: C96.1 J1.69(ADC-A6) R134.2 TP25.1
EXT_IB-FB: C95.1 J1.19(ADC-B6) R133.2 TP24.1
EXT_IC-FB: C97.1 J1.57(ADC-A0) R50.1 R135.2 TP19.1
FAULTN: J1.84(GPIO-14) J5.9 Q1.1(G) R9.2 U1.6(F\A\U\L\T\)
GH_A: R66.1 U1.47(GH_A)
GH_B: R68.1 U1.42(GH_B)
GH_C: R67.1 U1.37(GH_C)
GL_A: R69.1 U1.45(GL_A)
GL_B: R71.1 U1.40(GL_B)
GL_C: R70.1 U1.35(GL_C)
GPIO-28: J1.43(GPIO-28) J12.1
GPIO-29: J1.93(GPIO-29) J12.2
I-TOTAL: C86.1 J1.61(ADC-A2) J5.35 R130.2 TP23.1
IA-FB: C88.1 J1.13(ADC-B3) J1.59(ADC-A1) J5.37 TP17.1 TP21.1 U1.25(S01)
IB-FB: C87.1 J1.9(ADC_B1) J1.17(ADC-B5) J5.36 TP15.1 TP16.1 U1.26(S02)
IC-FB: J1.63(ADC-A3) J1.67(ADC-A5) J5.33 R50.2
ICLK-O: J8.2 U5.4(INB)
IGND: C20.2 C21.1 C22.2 C23.2 C25.1 C27.1 J7.3 J8.5 TP20.1 U2.5(-VO) U3.2(GND) U4.5(GND2) U5.2(GND1.2) U5.8(GND1.8)
IGPIO: J8.4 U5.3(INA)
ISD-I: J8.3 U5.6(OUTD)
ISD-O: J8.1 U5.5(INC)
LED-1: J1.33(GPIO-12) U6.3(2A)
LED-2: J1.34(GPIO-15) U6.1(1A)
OCTWN: J1.83(GPIO-13) J5.12 Q2.1(G) R10.2 U1.5(O\C\T\W\)
PWM_AH: J1.23(GPIO-00) J5.25 U1.17(INH_A)
PWM_AL: J1.73(GPIO-1) J5.23 U1.18(INL_A)
PWM_BH: J1.24(GPIO-02) J5.28 U1.19(INH_B)
PWM_BL: J1.74(GPIO-3) J5.24 U1.20(INL_B)
PWM_CH: J1.25(GPIO-04) J5.26 U1.21(INH_C)
PWM_CL: J1.75(GPIO-5) J5.22 U1.22(INL_C)
PWRGD: R11.2 TP3.1 U1.4(PWRGD)
QEPA: J1.40(GPIO-20) J5.7 U7.1(A1)
QEPB: J1.90(GPIO-21) J5.10 U7.3(A2)
QEPI: J1.91(GPIO-23) J5.8 U7.4(A3)
REF_1.65V: C48.1 R87.2 R107.2 R108.2 R113.2 R128.1 TP5.1 U9.4(-IN)
SCLK: R40.2 R41.1 R119.2 U1.11(SCLK/OC_ADJ)
SCLK_: J1.36(GPIO-26) J20.7 R119.1
SDI: J1.35(GPIO-24) J20.8 R44.2 R45.1 U1.9(SDI/M_OC)
SDO: J1.85(GPIO-25) J20.5 R42.2 R43.1 U1.10(SDO/GAIN)
SENSE_N1: C78.2 R80.3 R104.1 R109.2 R125.1
SENSE_N2: C75.2 R81.3 R94.1 R111.2 R126.1
SENSE_N3: C84.2 C98.1 R82.3 R102.1 R127.1
SENSE_P1: C78.1 R80.4 R101.1 R110.2 R122.1
SENSE_P2: C75.1 R81.4 R92.1 R112.2 R123.1
SENSE_P3: C84.1 C98.2 R82.4 R99.1 R124.1
SH_A: C16.2 J11.1A(1#1A) J11.1B(1#1B) J11.1C(1#1C) J11.1D(1#1D) Q4.3(S) Q7.2(D) R60.2 TP12.1 U1.46(SH_A)
SH_B: C17.2 J11.2A(2#2A) J11.2B(2#2B) J11.2C(2#2C) J11.2D(2#2D) Q6.3(S) Q9.2(D) R61.2 TP13.1 U1.41(SH_B)
SH_C: C18.2 J11.3A(3#3A) J11.3B(3#3B) J11.3C(3#3C) J11.3D(3#3D) Q5.3(S) Q8.2(D) R63.2 TP14.1 U1.36(SH_C)
SL_A: Q7.3(S) R80.1 U1.44(SL_A)
SL_B: Q9.3(S) R81.1 U1.39(SL_B)
SL_C: Q8.3(S) R82.1 U1.34(SL_C)
SN1: C79.1 R109.1 U1.33(SN1)
SN2: C80.1 R111.1 U1.31(SN2)
SP1: C79.2 R110.1 U1.32(SP1)
SP2: C80.2 R112.1 U1.30(SP2)
SPI-CLK: J1.39(GPIO-18) U5.13(OUTB)
SPI-SIMO: J1.38(GPIO-16) U5.12(OUTC)
SPI-SOMI: J1.88(GPIO-17) U5.11(IND)
SPI-STE: J1.89(GPIO-19) U5.14(OUTA)
START: C28.2 J1.78(GPIO-9) J23.2 R19.2 SW1.3 SW1.4
STATUS: J1.41(GPIO-22) J5.5 Q3.1(G) R21.1
STOP: C32.2 J1.76(GPIO-7) J24.2 R25.2 SW2.3 SW2.4
TCK: J1.48(TCK) J21.9 J21.11
TDI: J1.97(TDI) J21.3
TDO: J1.98(TD0) J21.7
TMS: J1.49(TMS) J21.1
TRSTN: J1.99(TRSTN) J21.2
TSI: C34.2 J1.7(ADC-B0) J5.38 R28.2(WIPER)
VDCBUS: J1.11(ADC_B2) J5.34 R35.2 R36.1
VDD_SPI/BIAS: C73.2 R132.2 U1.49(VDD_SPI/BIAS)
N01499: C9.1 U1.52(BST_BK)
N01516: C9.2 D1.2(CATHODE) L1.1 U1.50(PH) U1.51(PH1)
N9704593: C19.1 R16.2 U2.1(+VI)
N9704937: C21.2 U3.4(NR)
N9709554: JP4.1 R17.2
N9725459: LED6.1(ANODE) Q1.3(D1)
N9736337: R27.2 U6.4(2Y)
N9736341: LED10.1(ANODE) R27.1
N9736352: LED11.1(ANODE) R24.2
N9740975: R24.1 U6.6(1Y)
N9752222: LED12.1(ANODE) R18.1
N9752229: LED12.2(CATHODE) Q3.3(D)
N9756046: R1.2 U1.1(RT_CLK)
N9756420: C10.2 U1.23(DVDD)
N9756424: C14.1 U1.13(GVDD)
N9756428: C15.2 U1.27(AVDD)
N9757075: R8.2 U1.7(DTC)
N9757564: R6.2 R7.1 U1.3(VSENSE)
N9758946: C2.2 R4.2 U1.2(COMP)
N9758958: C1.2 R4.1
N9761787: LED5.1(ANODE) Q2.3(D1)
N9773686: C76.2 R98.1 U11.5(+VCC)
N9773852: R104.2 R105.1 U11.4(-IN)
N9773876: R101.2 R108.1 U11.3(+IN)
N9773946: R105.2 R134.1 TP22.1 U11.1(OUT)
N9774272: R94.2 R95.1 U10.4(-IN)
N9774292: R92.2 R107.1 U10.3(+IN)
N9774370: R95.2 R133.1 TP18.1 U10.1(OUT)
N9775307: LED1.2(CATHODE) R48.1
N9775421: LED3.2(CATHODE) R49.1
N9775848: C53.1 R39.2
N9786772: C47.2 U8.4(NR)
N9787605: C16.1 U1.48(BST_A)
N9787633: C17.1 U1.43(BST_B)
N9787673: C18.1 U1.38(BST_C)
N9813795: Q5.1(G) R67.2
N9813799: Q6.1(G) R68.2
N9813803: Q8.1(G) R70.2
N9813811: Q4.1(G) R66.2
N9819904: R37.2 R38.1 U9.3(+IN)
N9828585: C4.1 U1.56(SS_TR)
N9829108: D2.1(CATHODE) R2.2 R3.1 U1.55(EN_BUCK)
N9851972: C3.1 U1.14(CP1)
N9852005: C3.2 U1.15(CP2)
N9869493: LED5.2(CATHODE) R15.1
N9875151: Q9.1(G) R71.2
N9901108: LED6.2(CATHODE) R14.1
N10026896: C77.2 R97.1 U12.5(+VCC)
N10027072: R102.2 R103.1 U12.4(-IN)
N10027102: R99.2 R113.1 U12.3(+IN)
N10027168: R103.2 R135.1 TP27.1 U12.1(OUT)
N10115342: R87.1 U9.1(OUT)
N10121702: Q7.1(G) R69.2
N10155029: C74.2 R91.1 U10.5(+VCC)
N10297997: R5.2 R6.1 TP2.1
N10355073: C85.2 R117.1 U13.5(+VCC)
N10356051: R122.2 R123.2 R124.2 R128.2 U13.3(+IN)
N10356102: R125.2 R126.2 R127.2 R129.1 U13.4(-IN)
N10356298: R129.2 R130.1 U13.1(OUT)

Pads without a net: J1 1 2 3 4 5 6 16 18 20 22 32 45 46 51 52 53 54 55 56 65 66 68 70 72 95; J20 1 3 4 6; J21 6; NOREF 1; NOREF#5 1; NOREF#12 1; NOREF#13 1; NOREF#16 1; NOREF#17 1; NOREF#18 1; NOREF#19 1

## Via types
v1: diameter 0.686, hole 0.381, TOP to BOTTOM, 940 vias
v2: diameter 1.001, hole 0.65, TOP to BOTTOM, 40 vias

## Routing (per net, layer and track width the routed paths; a pad name or vN(x,y) marks a point on that pad's centre or on a via; arc(x,y) is an arc through that point)
GND: length 340.9
  TOP w0.254: U1.28 52.96,128.91 ; 59.94,141.22 59.94,140.21 ; U6.2 v1(18.29,146.94)
  TOP w0.381: C76.1 8.71,50.65 ; C59.2 9.33,31.85 9.23,31.75 v1(8.26,31.75) U9.2 ; U10.2 9.27,40.89 ; 10.16,40.16 C74.1 ; 8.26,51.1 U11.2 ; 68.96,126.75 68.96,124.97
  TOP w0.508: 77.15,71.99 C93.2 75.8,73.34 ; 95.89,134.24 J13.2 94.1,134.24 ; 37.92,153.23 J1.8 ; J1.8 37.92,151.88 ; J1.8 39.27,153.23 ; J1.8 39.27,151.88 ; 63.37,179.45 J20.2 ; J20.2 65.16,179.45 ; J20.2 65.16,181.23 ; J20.2 63.37,181.23 ; 112.88,170.35 J21.12 112.88,172.14 ; J21.8 117.96,172.14 ; J21.8 116.17,170.35 ; J21.8 116.17,172.14 ; J21.8 117.96,170.35 ; 43,153.23 J1.12 ; J1.12 44.35,151.88 ; J1.12 44.35,153.23 ; J1.12 43,151.88 ; 25.27,181.23 J5.27 27.06,181.23 ; J2.2 127.26,165.69 ; J2.2 125.21,167.73 ; J2.2 125.21,165.69 ; J2.2 127.26,167.73 ; 117.89,45.81 C50.2 ; C50.2 119.85,45.81 ; C50.2 119.85,47.78 ; C50.2 117.89,47.78 ; 44.31,72.25 C94.2 ; C94.2 44.31,73.59 ; C94.2 45.65,72.25 ; 11,116.76 J24.1 ; J24.1 13.38,114.38 ; J24.1 13.38,116.76 ; J24.1 11,114.38 ; J1.47 93.88,155.14 ; J1.47 93.88,153.79 ; J1.47 92.53,153.79 ; J1.47 92.53,155.14 ; 40.46,151.88 J1.10 41.81,151.88 ; J21.4 123.04,170.35 ; J21.4 121.25,172.14 ; J21.4 121.25,170.35 ; 17.55,54.97 C77.1 ; 57.54,176.91 J5.4 57.54,178.69 ; 106.04,178.69 J4.5 ; J4.5 107.83,178.69 ; J4.5 106.04,176.91 ; J4.5 107.83,176.91 ; J10.5 92.08,176.91 ; J10.5 90.29,176.91 ; J10.5 90.29,178.69 ; J10.5 92.08,178.69 ; J21.10 115.42,172.14 ; J21.10 115.42,170.35 ; J21.10 113.63,170.35 ; J21.10 113.63,172.14 ; R28.1 39.58,134 ; R28.1 37.53,134 ; R28.1 37.53,131.96 ; TP8.1 99.83,132.71 ; TP8.1 99.83,134.5 ; TP8.1 98.04,134.5 ; TP8.1 98.04,132.71 ; J6.5 68.46,141.22 ; J6.5 66.67,143.01 ; J6.5 68.46,143.01 ; J6.5 66.67,141.22 ; J5.39 11.82,181.23 ; J5.39 10.03,181.23 ; J5.39 11.82,179.45 ; J5.39 10.03,179.45 ; 11,121.24 J23.1 ; J23.1 11,123.62 ; J23.1 13.38,121.24 ; J23.1 13.38,123.62 ; 67.42,155.34 J1.27 67.8,155.34 ; J1.58 39.27,157.05 ; J1.58 39.27,155.7 ; J1.58 37.92,155.7 ; J1.58 37.92,157.05 ; 10.03,178.69 J5.40 ; J5.40 11.82,178.69 ; J5.40 10.03,176.91 ; J5.40 11.82,176.91 ; J5.3 57.54,179.45 ; J5.3 57.54,181.23 ; J5.3 55.75,181.23 ; J1.14 46.89,153.23 ; J1.14 45.54,151.88 ; J1.14 46.89,151.88 ; J1.14 45.54,153.23 ; 6.85,162.55 TP7.1 ; TP7.1 6.85,164.34 ; TP7.1 8.64,164.34 ; TP7.1 8.64,162.55 ; U2.2 123.02,105.32 ; U2.2 121.33,107.02 ; U2.2 121.33,105.32 ; U2.2 123.02,107.02 ; J20.10 75.32,181.23 ; J20.10 75.32,179.45 ; J20.10 73.53,179.45 ; 36.32,178.99 J5.20 36.82,178.96 ; 32.64,107.82 TP10.1 30.86,107.82 ; 45.54,155.7 J1.64 ; J1.64 46.89,155.7 ; J1.64 45.54,157.05 ; 23.62,178.99 J5.30 23.62,176.61 ; 91.82,2.28 TP9.1 ; TP9.1 91.82,4.07 ; TP9.1 93.6,4.07 ; TP9.1 93.6,2.28 ; 44.35,155.7 J1.62 44.35,157.05 ; 37.22,181.23 J5.19 35.43,181.23
  TOP w0.584: 10.16,40.16 10.01,40.16 9.27,40.89 ; 16.76,55.75 17.55,54.97
  TOP w0.635: v1(12.32,64.64) 12.83,64.14 ; 8.71,50.65 8.26,51.1
  TOP w1.905: v2(71.88,70.61) 69.85,72.64 C82.2 ; v2(40.13,70.87) 38.1,72.9 C83.2
  BOTTOM w0.508: 37.92,153.23 J1.8 ; J1.8 39.27,153.23 ; J1.8 39.27,151.88 ; J1.8 37.92,151.88 ; J1.58 39.27,157.05 ; J1.58 37.92,155.7 ; J1.58 39.27,155.7 ; J1.58 37.92,157.05 ; J1.10 41.81,153.23 ; J1.10 40.46,153.23 ; J1.10 41.81,151.88 ; 45.54,151.88 J1.14 ; J1.14 46.89,153.23 ; J1.14 45.54,153.23 ; TP8.1 99.83,134.5 ; TP8.1 99.83,132.71 ; TP8.1 98.04,132.71 ; TP8.1 98.04,134.5 ; J1.27 68.48,155.14 ; J1.27 67.13,153.79 ; J1.27 67.13,155.14 ; J4.5 107.83,178.69 ; J4.5 107.83,176.91 ; J4.5 106.04,178.69 ; J4.5 106.04,176.91 ; 43,157.05 J1.62 44.35,157.05 ; C93.2 77.15,71.99 ; C93.2 75.8,73.34 ; C93.2 77.15,73.34 ; C93.2 75.8,71.99 ; 22.73,178.69 J5.30 ; J5.30 24.52,176.91 ; J5.30 22.73,176.91 ; J5.30 24.52,178.69 ; TP9.1 93.6,2.28 ; TP9.1 91.82,2.28 ; TP9.1 91.82,4.07 ; TP9.1 93.6,4.07 ; J5.40 11.82,176.91 ; J5.40 10.03,176.91 ; J5.40 10.03,178.69 ; J5.40 11.82,178.69 ; 65.16,179.45 J20.2 63.37,179.45 ; U2.2 123.02,107.02 ; U2.2 121.33,107.02 ; U2.2 121.33,105.32 ; U2.2 123.02,105.32 ; 90.29,176.91 J10.5 ; J10.5 90.29,178.69 ; J10.5 92.08,178.69 ; J10.5 92.08,176.91 ; J2.2 127.26,165.69 ; J2.2 127.26,167.73 ; J2.2 125.21,165.69 ; J2.2 125.21,167.73 ; J5.39 11.82,179.45 ; J5.39 10.03,181.23 ; J5.39 11.82,181.23 ; J5.39 10.03,179.45 ; J21.12 112.88,170.35 ; J21.12 112.88,172.14 ; J21.12 111.09,172.14 ; J21.12 111.09,170.35 ; TP7.1 8.64,164.34 ; TP7.1 6.85,162.55 ; TP7.1 8.64,162.55 ; TP7.1 6.85,164.34 ; 117.89,45.81 C50.2 ; C50.2 119.85,47.78 ; C50.2 119.85,45.81 ; C50.2 117.89,47.78 ; 30.86,109.61 TP10.1 ; TP10.1 32.64,109.61 ; TP10.1 30.86,107.82 ; TP10.1 32.64,107.82 ; J1.12 44.35,153.23 ; J1.12 44.35,151.88 ; J1.12 43,151.88 ; J1.12 43,153.23 ; J5.19 37.22,179.45 ; J5.19 35.43,181.23 ; J5.19 37.22,181.23 ; J5.19 35.43,179.45 ; 45.54,157.05 J1.64 ; J1.64 46.89,155.7 ; J1.64 45.54,155.7 ; J1.64 46.89,157.05 ; J1.37 81.18,155.14 ; J1.37 81.18,153.79 ; J1.37 79.83,153.79 ; 113.63,170.35 J21.10 113.63,172.14 ; 37.53,134 R28.1 ; R28.1 39.58,131.96 ; R28.1 39.58,134 ; R28.1 37.53,131.96 ; 55.75,179.45 J5.3 55.75,181.23 ; 44.31,73.59 C94.2 ; C94.2 45.65,73.59 ; C94.2 45.65,72.25 ; C94.2 44.31,72.25 ; 75.32,179.45 J20.10 74.42,179.15 ; 55.75,176.91 J5.4 55.75,178.69 ; 66.67,143.01 J6.5 ; J6.5 68.46,143.01 ; J6.5 68.46,141.22 ; J5.27 27.06,181.23 ; J5.27 25.27,179.45 ; J5.27 27.06,179.45 ; J5.27 25.27,181.23 ; J1.60 41.81,155.7 ; J1.60 40.46,155.7 ; J1.60 40.46,157.05 ; J21.4 123.04,172.14 ; J21.4 121.25,172.14 ; J21.4 123.04,170.35 ; J21.4 121.25,170.35 ; 35.43,176.91 J5.20 ; J5.20 37.22,178.69 ; J5.20 35.43,178.69 ; J5.20 37.22,176.91 ; 13.38,114.38 J24.1 13.38,116.76 ; 13.38,123.62 J23.1 13.38,121.24 ; 93.88,155.14 J1.47 93.88,153.79 ; 117.07,172.44 J21.8 117.07,170.06 ; J13.2 95.89,134.24 ; J13.2 95.89,132.46 ; J13.2 94.1,134.24
  vias: v1(1.27,100.33) v1(1.27,29.46) v1(1.27,25.91) v1(1.78,166.62) v1(1.78,160.53) v1(1.78,145.8) v1(1.78,140.72) v1(1.78,128.52) v1(2.03,174.75) v1(2.54,22.86) v1(2.54,11.43) v1(3.56,40.89) v1(4.57,61.59) v1(4.7,65.28) v1(4.7,30.35) v1(4.83,31.75) v1(5.59,150.37) v1(5.84,141.22) v1(6.1,134.37) v1(6.1,129.29) v1(6.1,64.26) v1(6.35,17.78) v1(6.6,70.87) v1(6.6,25.53) v1(6.99,57.66) v1(6.99,51.05) v1(7.37,72.26) v1(7.62,55.12) v1(7.62,13.97) v1(7.62,10.16) v1(8.38,174.75) v1(8.38,167.89) v1(8.64,182.37) v1(8.89,22.86) v1(9.02,75.82) v1(9.02,49.4) v1(9.14,150.11) v1(9.27,44.83) v1(9.65,145.54) v1(9.65,26.92) v1(9.91,72.14) v1(10.16,143.26) v1(10.16,3.81) v1(10.41,157.73) v1(10.41,152.65) v1(10.41,135.13) v1(10.67,130.56) v1(10.67,62.36) v1(10.67,25.02) v1(10.92,141.22) v1(10.92,129.03) v1(11.18,136.4) v1(11.43,26.92) v1(11.43,19.05) v1(11.43,11.43) v1(11.68,161.04) v1(11.81,35.69) v1(11.81,31.62) v1(11.94,81.53) v1(11.94,78.74) v1(12.7,173.74) v1(12.7,3.81) v1(12.95,62.1) v1(13.08,42.29) v1(13.21,155.7) v1(13.59,57.91) v1(13.72,167.64) v1(13.72,46.99) v1(13.97,182.88) v1(15.24,59.56) v1(15.24,15.24) v1(15.24,10.16) v1(15.75,174.24) v1(15.75,152.65) v1(16,158.5) v1(16,144.27) v1(16,140.72) v1(16.26,159.77) v1(16.51,5.08) v1(17.02,164.08) v1(17.53,130.05) v1(17.65,53.98) v1(18.03,149.1) v1(18.03,59.56) v1(18.16,73.03) v1(18.29,175.01) v1(18.29,61.59) v1(19.05,167.89) v1(20.57,159.77) v1(20.57,120.65) v1(20.83,169.16) v1(21.08,161.8) v1(21.34,137.16) v1(21.34,127.76) v1(21.34,123.7) v1(21.59,182.88) v1(21.59,132.84) v1(21.59,11.43) v1(22.1,152.15) v1(22.35,140.21) v1(22.86,163.83) v1(22.86,130.05) v1(23.37,149.61) v1(23.62,160.53) v1(23.62,145.8) v1(23.62,120.65) v1(23.88,137.16) v1(24.13,127.25) v1(24.38,176.02) v1(24.38,165.61) v1(24.64,143) v1(25.91,122.68) v1(26.16,167.13) v1(26.67,173.74) v1(27.18,159.77) v1(27.69,107.7) v1(27.94,15.24) v1(28.45,115.06) v1(28.96,146.05) v1(28.96,108.97) v1(29.21,116.84) v1(29.46,118.36) v1(29.72,160.27) v1(29.97,170.43) v1(30.23,182.88) v1(30.48,2.54) v1(30.73,120.14) v1(31.24,158.5) v1(31.75,20.32) v1(31.75,11.43) v1(31.88,128.78) v1(32,161.29) v1(32.38,163.45) v1(32.51,131.83) v1(32.77,122.17) v1(33.02,155.19) v1(33.53,140.46) v1(33.53,137.16) v1(33.53,107.95) v1(33.66,128.78) v1(33.78,176.02) v1(35.81,134.37) v1(36.07,152.4) v1(36.32,149.61) v1(36.32,146.05) v1(36.32,142.75) v1(36.32,120.65) v1(36.83,108.97) v1(37.34,182.88) v1(38.1,149.61) v1(38.61,171.2) v1(39.24,146.05) v1(40.13,124.71) v1(40.64,149.61) v1(40.89,134.11) v1(41.4,150.37) v1(41.91,145.8) v1(41.91,2.54) v1(42.16,142.49) v1(42.16,119.89) v1(42.67,107.95) v1(42.93,116.59) v1(43.18,118.36) v1(43.18,34.29) v1(43.43,150.37) v1(43.69,143.51) v1(43.69,45.85) v1(44.45,40.64) v1(44.45,24.13) v1(44.45,13.97) v1(44.96,119.63) v1(45.47,150.37) v1(45.72,182.88) v1(45.72,145.8) v1(45.72,140.21) v1(46.23,126.87) v1(46.48,124.46) v1(46.99,17.78) v1(48.26,2.54) v1(48.77,126.24) v1(49.53,174.24) v1(49.78,127.25) v1(49.78,126.24) v1(50.16,135) v1(51.05,126.75) v1(51.05,125.73) v1(52.07,146.05) v1(52.32,171.2) v1(52.32,133.1) v1(52.32,128.52) v1(52.32,126.75) v1(52.32,125.73) v1(52.58,174.5) v1(52.7,140.46) v1(53.09,176.28) v1(53.34,144.53) v1(53.34,141.99) v1(53.34,134.11) v1(53.85,149.61) v1(53.85,126.24) v1(53.85,125.22) v1(53.85,124.21) v1(54.86,126.24) v1(54.86,125.22) v1(54.86,124.21) v1(55.12,146.05) v1(55.12,140.46) v1(55.12,135.13) v1(55.12,134.11) v1(55.37,182.12) v1(55.88,126.24) v1(55.88,125.22) v1(55.88,124.21) v1(56.13,174.75) v1(56.9,126.24) v1(56.9,125.22) v1(56.9,124.21) v1(57.15,153.67) v1(57.15,107.7) v1(57.66,152.15) v1(57.91,162.31) v1(57.91,126.24) v1(57.91,125.22) v1(57.91,124.21) v1(58.42,155.19) v1(58.42,149.61) v1(58.42,12.7) v1(58.93,126.24) v1(58.93,125.22) v1(58.93,124.21) v1(59.44,139.7) v1(59.69,173.74) v1(59.94,153.92) v1(59.94,126.24) v1(59.94,125.22) v1(59.94,124.21) v1(60.2,151.38) v1(60.71,163.07) v1(60.96,126.24) v1(60.96,125.22) v1(60.96,124.21) v1(61.21,175.01) v1(61.21,159.51) v1(61.72,180.09) v1(61.72,143.76) v1(61.72,137.16) v1(61.72,136.14) v1(61.98,126.24) v1(61.98,125.22) v1(61.98,124.21) v1(62.23,17.78) v1(62.23,3.81) v1(62.48,163.58) v1(62.74,137.16) v1(62.99,126.24) v1(62.99,125.22) v1(62.99,124.21) v1(63.5,160.27) v1(64.01,126.24) v1(64.01,125.22) v1(64.01,124.21) v1(64.26,175.01) v1(64.77,109.47) v1(65.02,126.24) v1(65.02,125.22) v1(65.02,124.21) v1(65.28,132.97) v1(66.04,126.24) v1(66.04,125.22) v1(66.04,124.21) v1(66.8,159.51) v1(67.06,143.76) v1(67.94,109.6) v1(68.33,169.93) v1(68.58,176.28) v1(69.34,151.13) v1(69.34,143.76) v1(70.36,174.75) v1(70.61,118.87) v1(70.61,117.86) v1(70.87,116.33) v1(70.87,115.32) v1(71.12,143.76) v1(71.63,131.06) v1(71.63,118.87) v1(71.63,117.86) v1(71.88,168.15) v1(72.14,109.47) v1(72.64,165.61) v1(72.64,163.58) v1(72.64,120.14) v1(72.9,144.02) v1(73.15,125.98) v1(73.66,2.54) v1(74.17,125.98) v1(74.42,120.14) v1(74.68,143.76) v1(74.93,45.72) v1(74.93,26.67) v1(75.18,172.72) v1(75.18,125.98) v1(75.18,124.97) v1(75.18,123.95) v1(75.18,122.94) v1(75.18,121.92) v1(75.18,119.38) v1(75.18,118.36) v1(75.69,176.28) v1(76.2,149.35) v1(76.2,148.34) v1(76.2,146.3) v1(76.2,35.56) v1(76.45,145.03) v1(76.71,178.82) v1(77.22,172.72) v1(77.22,144.02) v1(77.47,176.78) v1(78.49,144.02) v1(78.74,132.08) v1(78.74,129.79) v1(78.74,109.73) v1(79.5,168.66) v1(79.5,134.11) v1(79.76,144.02) v1(79.76,143) v1(80.01,128.52) v1(80.77,135.38) v1(81.03,107.95) v1(81.79,168.66) v1(81.79,166.12) v1(82.04,133.35) v1(82.55,131.06) v1(82.55,3.81) v1(83.31,135.38) v1(83.82,179.58) v1(84.33,166.12) v1(84.58,139.45) v1(84.84,127) v1(85.34,133.6) v1(85.6,125.48) v1(85.6,124.46) v1(85.6,123.44) v1(85.85,127) v1(86.11,140.97) v1(86.11,107.95) v1(86.36,169.93) v1(86.61,116.33) v1(87.12,125.73) v1(87.12,122.94) v1(87.12,119.13) v1(87.63,174.75) v1(87.63,1.27) v1(87.88,141.73) v1(88.9,122.43) v1(89.41,118.11) v1(89.66,138.18) v1(89.92,175.01) v1(89.92,168.4) v1(89.92,113.28) v1(90.17,144.78) v1(90.68,124.21) v1(90.93,125.98) v1(91.19,166.12) v1(91.57,160.53) v1(91.57,159.38) v1(91.95,151.13) v1(92.2,175.01) v1(92.2,120.65) v1(92.71,143) v1(93.22,178.56) v1(93.22,118.11) v1(93.73,168.4) v1(93.98,122.43) v1(94.23,151.13) v1(94.23,107.95) v1(94.49,143) v1(94.49,136.65) v1(95.5,169.93) v1(95.5,126.49) v1(95.5,123.95) v1(95.76,167.13) v1(96.01,175.77) v1(97.03,150.62) v1(97.03,131.32) v1(97.03,112.27) v1(97.54,168.91) v1(97.79,136.91) v1(98.3,118.11) v1(99.06,151.13) v1(99.31,131.32) v1(99.57,141.73) v1(99.82,123.7) v1(99.82,120.65) v1(100.58,107.95) v1(101.09,143) v1(101.6,115.57) v1(102.36,126.75) v1(102.36,111.25) v1(102.87,143) v1(102.87,131.32) v1(102.87,6.35) v1(102.87,1.27) v1(103.12,136.91) v1(104.14,167.89) v1(104.14,133.86) v1(104.9,170.94) v1(105.16,182.37) v1(105.16,148.34) v1(105.16,123.7) v1(105.16,120.65) v1(105.16,118.11) v1(105.66,175.77) v1(105.92,139.95) v1(105.92,131.32) v1(106.43,114.3) v1(106.43,107.95) v1(106.68,58.42) v1(106.68,36.83) v1(106.93,150.11) v1(106.93,146.56) v1(106.93,120.14) v1(107.95,54.61) v1(107.95,49.53) v1(107.95,43.18) v1(107.95,25.4) v1(107.95,17.78) v1(107.95,3.81) v1(108.2,151.38) v1(108.46,148.08) v1(108.71,126.49) v1(108.97,177.55) v1(109.73,117.35) v1(110.49,107.95) v1(111,118.11) v1(111.25,160.27) v1(111.51,182.37) v1(111.51,162.81) v1(111.51,121.16) v1(111.76,111.76) v1(111.76,36.83) v1(112.01,123.44) v1(112.52,168.66) v1(112.78,101.85) v1(113.03,52.07) v1(114.05,166.12) v1(114.3,105.41) v1(114.3,6.35) v1(114.3,1.27) v1(115.57,167.89) v1(115.82,108.46) v1(116.84,48.26) v1(116.84,44.45) v1(117.86,178.05) v1(118.11,39.37) v1(118.11,31.75) v1(118.11,25.4) v1(118.11,17.78) v1(119.38,169.16) v1(119.38,99.06) v1(120.4,182.12) v1(120.65,48.26) v1(120.65,44.45) v1(120.65,3.81) v1(121.92,97.79) v1(121.92,93.98) v1(122.17,163.58) v1(123.19,36.83) v1(124.46,50.8) v1(125.73,25.4) v1(127,50.8) v1(127,39.37) v1(128.27,46.99) v1(128.78,175.01) v1(128.78,171.2) v1(129.16,157.86) v1(129.16,156.84) v1(129.16,154.05) v1(129.16,153.03) v2(23.37,66.04) v2(24.64,66.04) v2(25.91,66.04) v2(27.18,66.04) v2(28.45,66.04) v2(29.46,64.77) v2(29.46,63.5) v2(29.46,62.23) v2(38.86,71.63) v2(54.36,64.77) v2(54.36,63.5) v2(54.36,62.23) v2(55.12,66.04) v2(56.39,66.04) v2(57.66,66.04) v2(58.93,66.04) v2(60.2,66.04) v2(70.87,71.37) v2(85.85,64.77) v2(85.85,63.5) v2(85.85,62.23) v2(86.87,66.04) v2(88.14,66.04) v2(89.41,66.04) v2(90.68,66.04) v2(91.95,66.04) v2(102.23,74.3) v2(102.23,72.77) v2(103.63,71.75) v2(105.16,71.75)
PVDD: length 31.6
  TOP w0.254: R35.1 46.61,121.67 ; 65.41,121.41 65.42,121.39 U1.54 ; R2.1 71.81,120.6 71.37,120.16 71.37,120.14 70.87,119.63 67.82,119.63 ; U1.53 65.13,121.39 65.15,121.41 ; U1.29 52.72,121.39 52.7,121.41 ; LED1.1 105.92,99.57
  TOP w1.016: R39.1 v1(115.57,94.49) ; C51.1 v1(114.05,96.77)
  TOP w1.905: v2(38.1,78.99) v2(38.1,77.72) C83.1 ; v2(69.85,79.5) v2(69.85,78.23) C82.1
  BOTTOM w0.508: TP6.1 110.62,96.65 ; TP6.1 108.83,94.86 ; TP6.1 110.62,94.86 ; TP6.1 108.83,96.65 ; 81.25,76.2 C93.1 80.01,77.44 ; 117.55,52.98 C50.1 ; C50.1 120.19,55.61 ; C50.1 117.55,55.61
  vias: v1(19.68,98.42) v1(19.68,93.34) v1(19.68,88.27) v1(19.68,83.19) v1(22.86,85.09) v1(22.86,80.64) v1(23.5,86.36) v1(24.77,103.5) v1(24.77,98.42) v1(24.77,93.34) v1(24.77,88.27) v1(25.4,84.45) v1(25.4,80.01) v1(27.3,86.36) v1(28.57,81.92) v1(29.84,103.5) v1(29.84,98.42) v1(29.84,93.34) v1(29.84,88.27) v1(31.11,84.45) v1(31.11,80.01) v1(32.38,86.36) v1(34.29,85.09) v1(34.29,80.64) v1(34.92,103.5) v1(34.92,98.42) v1(34.92,93.34) v1(34.92,88.27) v1(34.92,83.19) v1(34.92,78.11) v1(40.01,103.5) v1(40.01,98.42) v1(40.01,93.34) v1(40.01,88.27) v1(40.01,83.19) v1(50.29,122.43) v1(50.29,121.41) v1(50.29,120.4) v1(51.31,120.9) v1(51.44,103.5) v1(51.44,98.42) v1(51.44,93.34) v1(51.44,88.27) v1(51.44,83.19) v1(51.44,78.11) v1(54.61,84.65) v1(54.61,80.2) v1(55.24,85.92) v1(56.52,103.5) v1(56.52,98.42) v1(56.52,93.34) v1(56.52,88.27) v1(57.15,84.01) v1(57.15,79.57) v1(59.05,85.92) v1(60.33,81.47) v1(61.59,103.5) v1(61.59,98.42) v1(61.59,93.34) v1(61.59,88.27) v1(62.87,84.01) v1(62.87,79.57) v1(64.14,85.92) v1(65.41,117.22) v1(65.53,119.76) v1(66.04,84.65) v1(66.04,80.2) v1(66.29,117.22) v1(66.42,119.38) v1(66.67,103.5) v1(66.67,98.42) v1(66.67,93.34) v1(66.67,88.27) v1(66.67,83.19) v1(66.67,78.11) v1(67.18,117.22) v1(67.31,119.38) v1(71.75,103.5) v1(71.75,98.42) v1(71.75,93.34) v1(71.75,88.27) v1(71.75,83.19) v1(85.09,104.78) v1(85.09,99.69) v1(85.09,94.61) v1(85.09,89.53) v1(85.09,84.45) v1(85.09,79.38) v1(86.36,84.65) v1(86.36,80.2) v1(87,85.92) v1(88.9,84.01) v1(88.9,79.57) v1(90.17,104.78) v1(90.17,99.69) v1(90.17,94.61) v1(90.17,89.53) v1(90.81,85.92) v1(92.08,81.47) v1(94.61,84.01) v1(94.61,79.57) v1(95.25,104.78) v1(95.25,99.69) v1(95.25,94.61) v1(95.25,89.53) v1(95.89,85.92) v1(97.79,84.65) v1(97.79,80.2) v1(100.33,104.78) v1(100.33,99.69) v1(100.33,94.61) v1(100.33,89.53) v1(100.33,84.45) v1(100.33,79.38) v1(105.41,104.78) v1(105.41,99.69) v1(105.41,94.61) v1(105.41,89.53) v1(105.41,84.45) v2(102.23,77.85) v2(102.23,76.45) v2(103.5,78.99) v2(105.16,78.99)
VCC_3.3V: length 181.2
  TOP w0.254: C26.2 v1(112.01,137.92) ; C35.2 v1(13.34,146.94) U6.5 ; Q2.2 v1(15.46,138.49) ; v1(82.7,138.28) 79.55,135.13 74.42,135.13 71.25,131.95 R11.1 ; R40.1 64.9,141.99 v1(64.64,142.24) ; U7.8 v1(103.85,164.63) ; R25.1 v1(15.24,113.79) ; U5.10 v1(109.73,147.47) ; R42.1 90.3,182.63 v1(89.92,182.25) ; v1(15.75,132.33) 14.37,132.33 Q1.2 ; R9.1 R10.1 86.87,142.37 86.49,141.99 85.72,141.99 83.69,139.95 v1(83.69,138.18) ; v1(89.92,180.59) R44.1 ; U4.1 v1(111.84,131.65) ; R18.2 v1(14.99,125.22) ; R19.1 v1(15.24,119.13) ; U5.16 v1(109.98,139.85) ; U7.2 v1(103.59,160.73) ; R46.1 v1(80.39,181.23) ; C24.2 v1(112.01,134.87) ; R37.1 v1(3.56,29.97)
  TOP w0.305: U1.24 55.07,130.1 54.33,130.84 54.33,131.67 ; 54.33,131.67 54.33,136.24 54.07,136.5 v1(54.07,138.43) ; 54.33,131.67 C72.2
  TOP w0.381: C52.1 v1(1.65,33.91) ; C42.2 v1(112.01,150.75) ; U9.5 v1(8.47,33.27) C59.1 ; R117.2 v1(10.92,59.44) ; R91.2 v1(7.98,44.35) ; R97.2 v1(15.24,58.17) ; R98.2 v1(4.62,53.9)
  BOTTOM w0.254: 82.3,180.59 81.03,180.59 v1(80.39,181.23) ; 82.3,180.59 82.3,174.5 82.93,173.86 101.51,173.86 101.73,173.64 101.73,168.66 103.38,167 103.38,165.86 103.63,165.61 103.63,165.1 ; 82.3,180.59 v1(89.92,180.59) v1(89.92,182.25) ; v1(3.56,29.97) 3.56,33.27 ; 10.67,111.76 14.48,111.76 15.24,112.52 v1(15.24,113.79) ; v1(15.24,119.13) 14.48,118.36 10.67,118.36
  BOTTOM w0.381: v1(8.47,33.27) 2.54,33.27 ; 2.29,59.44 v1(10.92,59.44) 13.97,59.44 v1(15.24,58.17) ; v1(4.62,53.9) 2.74,53.9 2.54,54.1 ; J21.5 118.3,172.48 118.3,169.61 ; 2.29,45.21 2.32,45.17 5.63,45.17 6.45,44.35 v1(7.98,44.35)
  BOTTOM w0.508: 93.8,132 J13.1 ; J13.1 96.19,129.62 ; J13.1 93.8,129.62 ; 108.2,164.08 110.49,164.08 115.32,168.91 117.6,168.91 118.3,169.61 ; 98.8,128.53 TP4.1 100.59,128.53
  vias: v1(84.33,118.24) v1(84.33,117.47) v1(85.09,118.24) v1(85.09,117.47) v1(89.66,131.32) v1(90.55,130.66) v1(91.41,131.34) v1(92.18,130.63) v1(92.96,131.32) v1(92.96,129.92)
